# EAGLE board LG08.v1.0.2 (EAGLE 7.5.0)
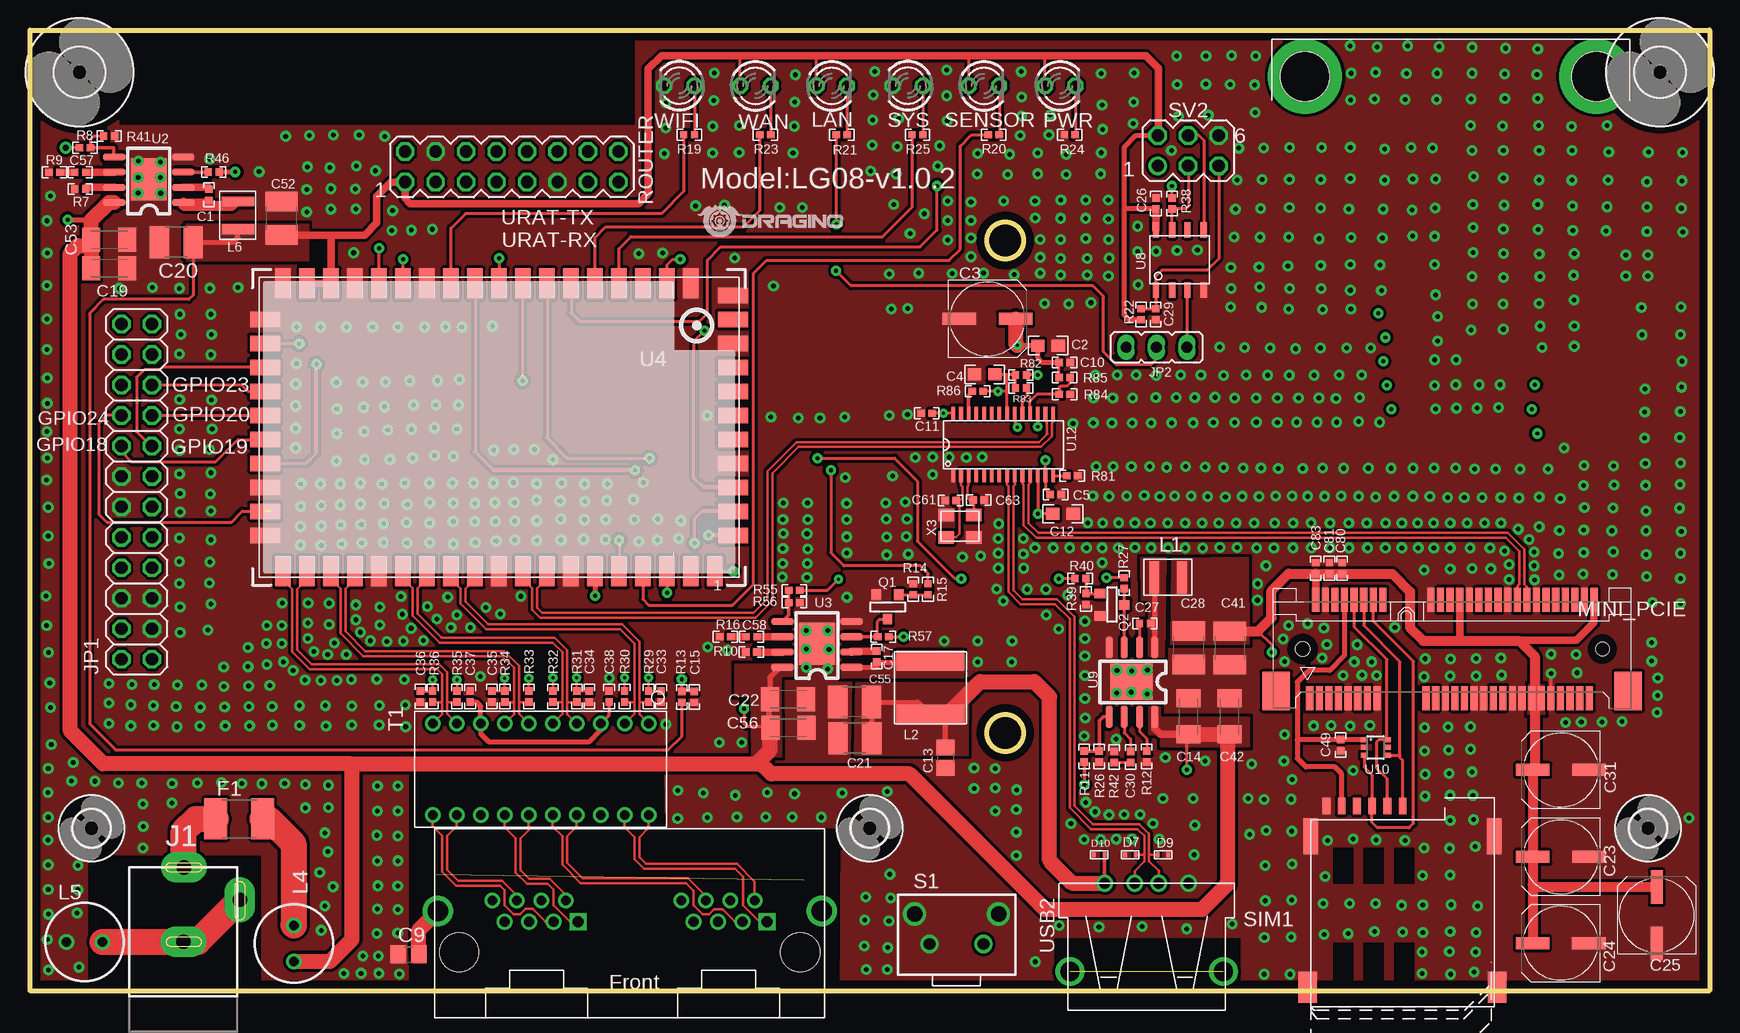
[diagram p0: board, top side]
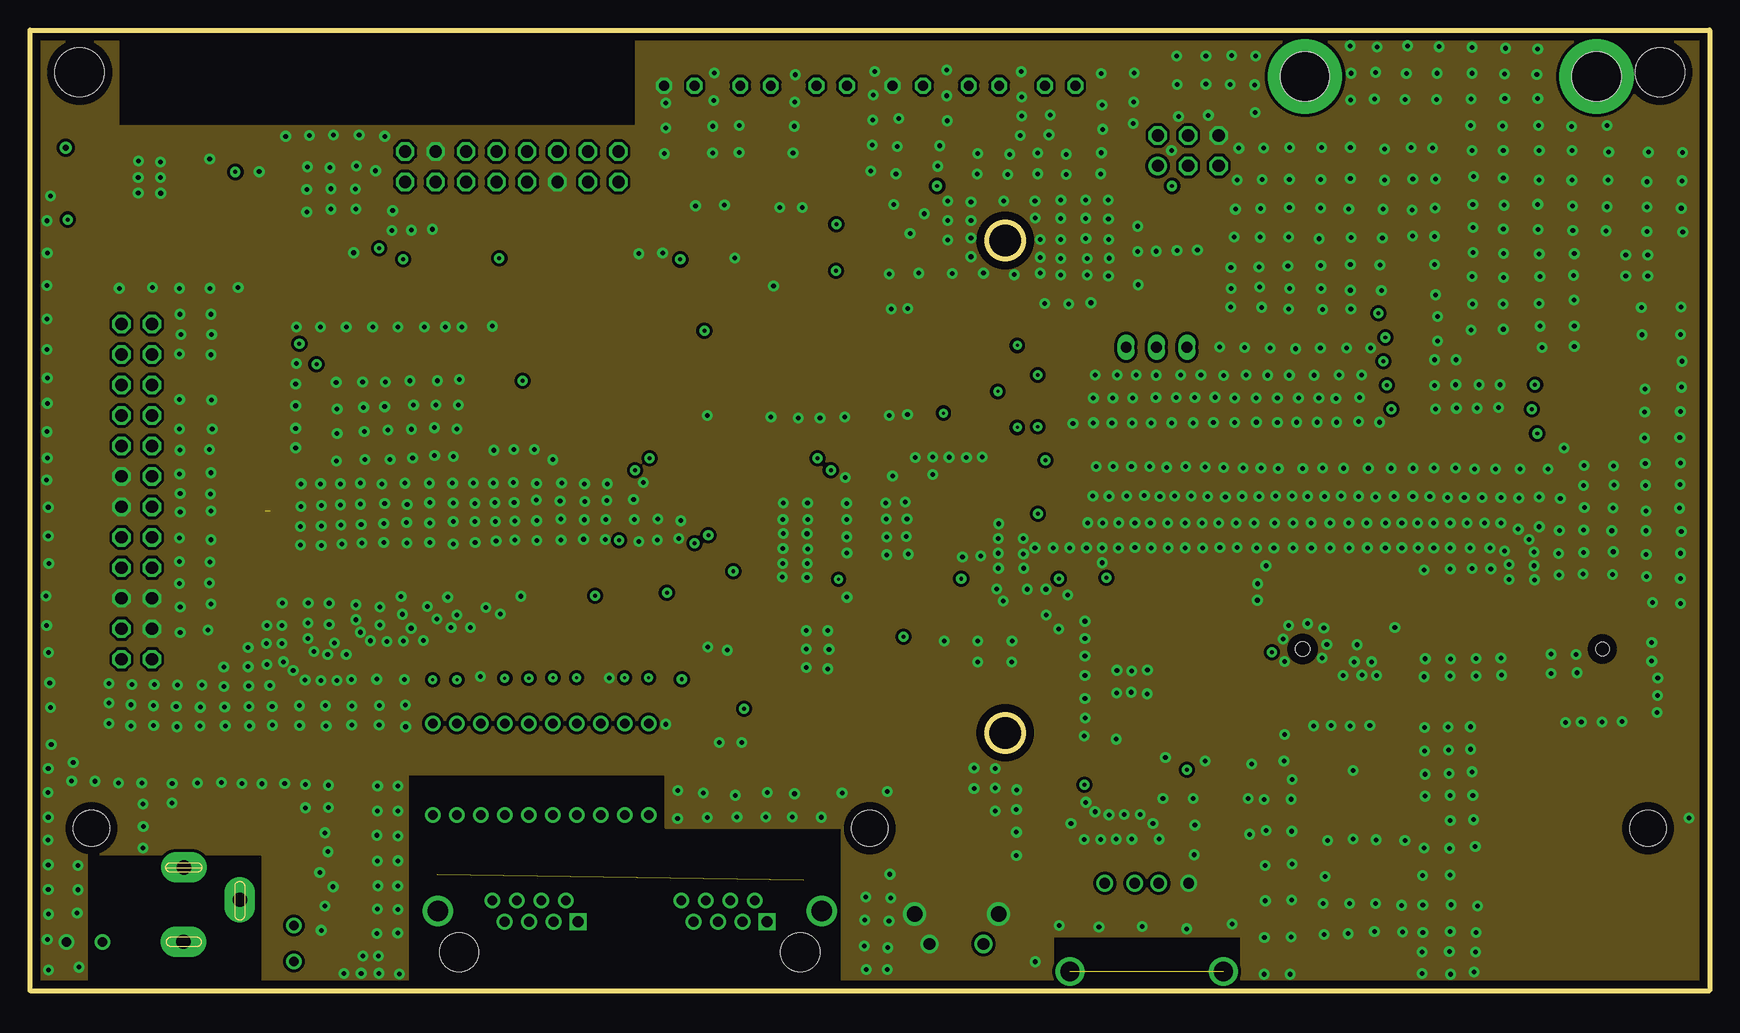
[diagram p1: board, inner layer Route2]
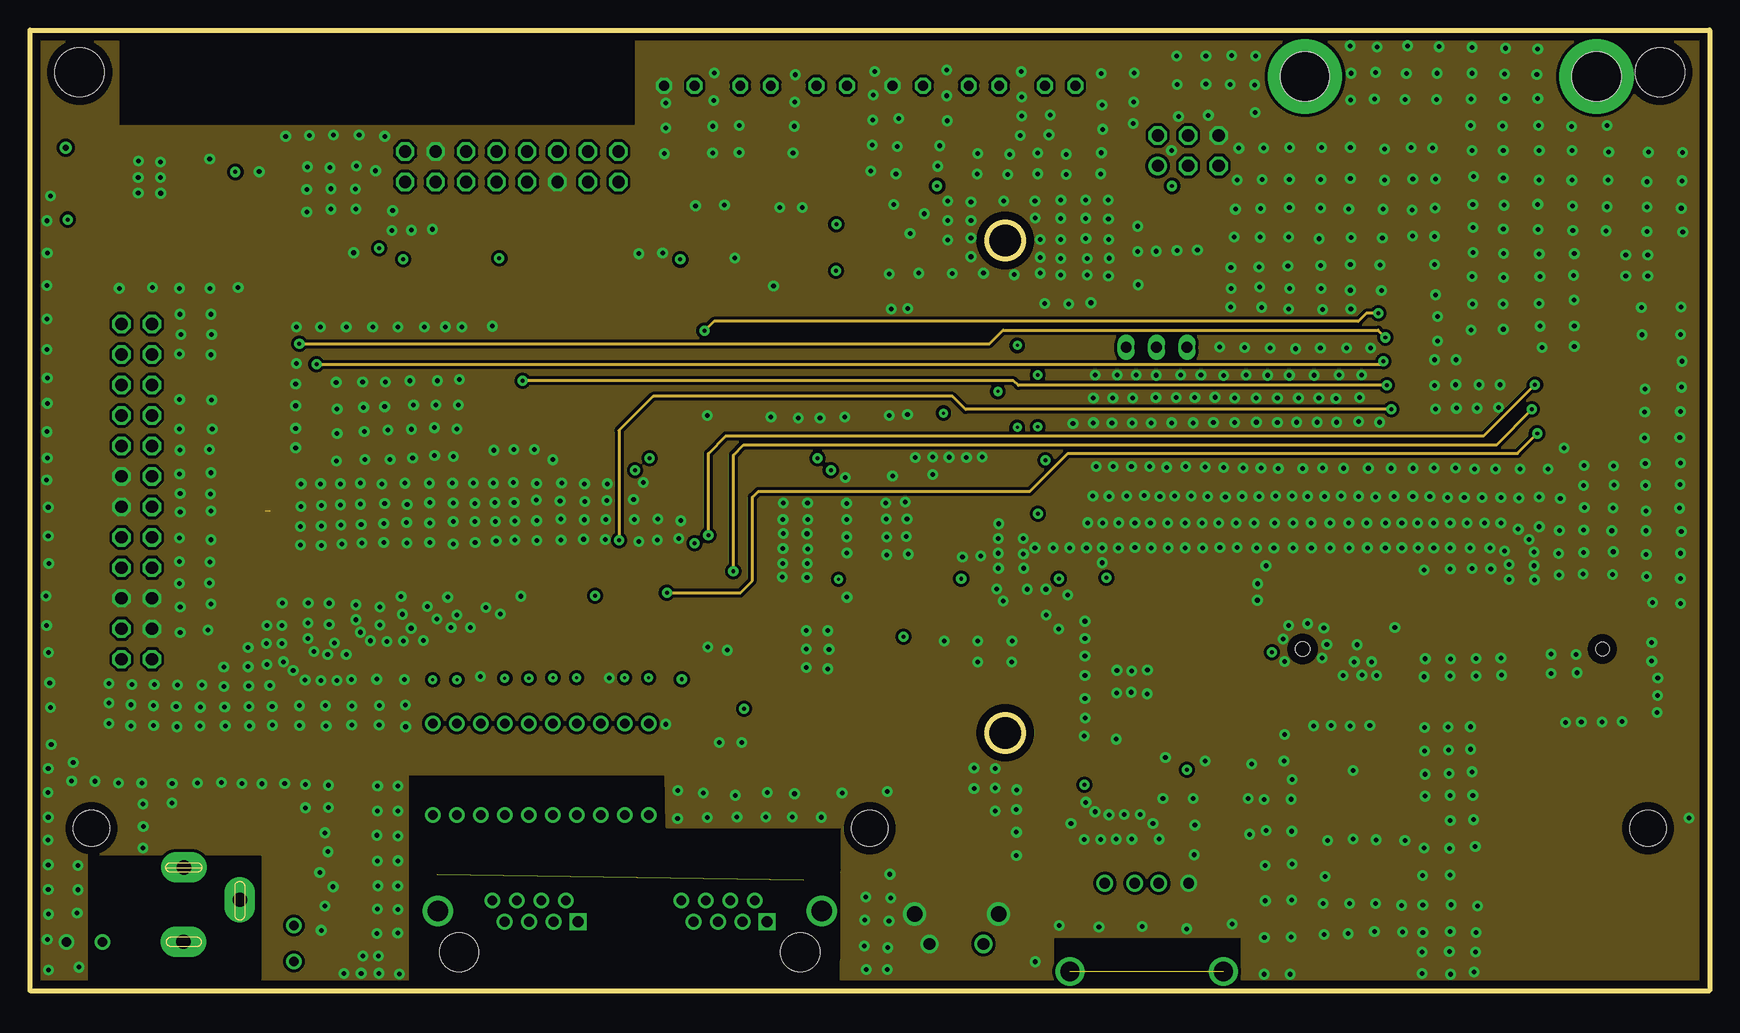
[diagram p2: board, inner layer Route15]
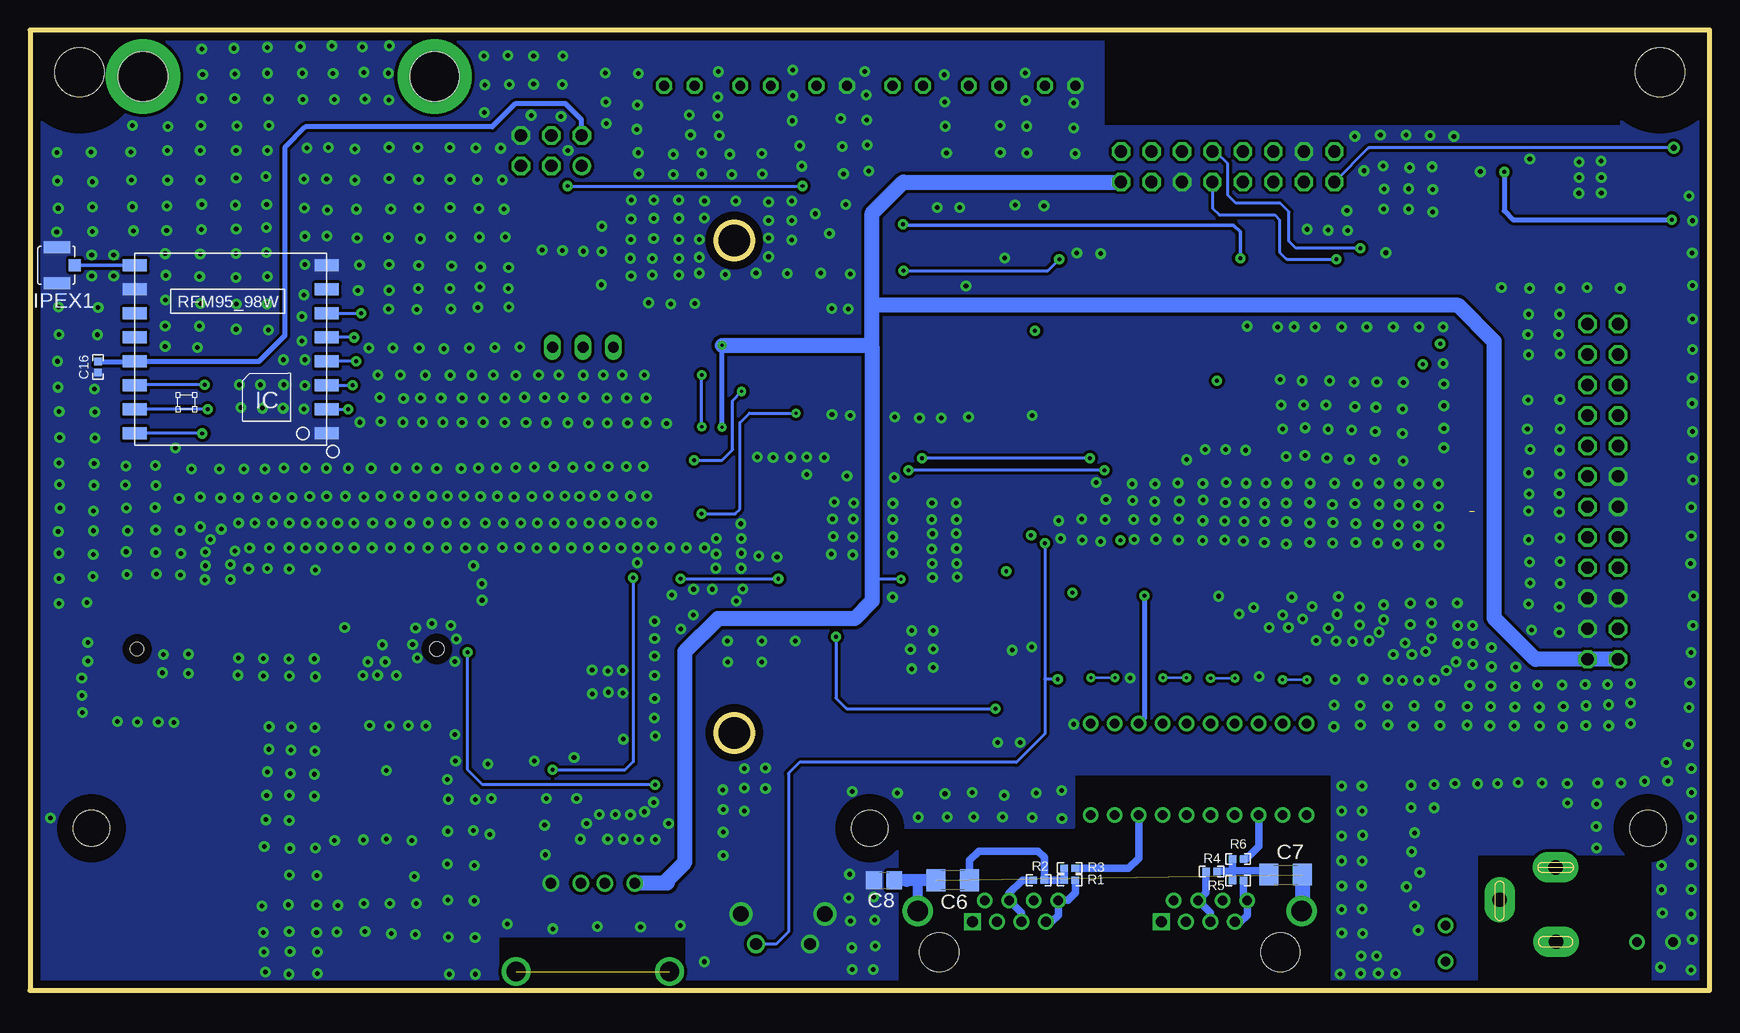
[diagram p3: board, bottom side, seen from below]

Size 140 x 80.05 mm. Coordinates in mm from the lower left corner, seen from the top.
Outline: 0,0 140,0 140,80.05 0,80.05 0,0
Outline: circle at 81.28,21.48 radius 1.52
Outline: circle at 81.28,62.5 radius 1.52
Copper layers (1*2+15*16): Top 0.035mm / dielectric 1.5mm / Route2 0.035mm / dielectric 0.15mm / Route15 0.035mm / dielectric 0.2mm / Bottom 0.035mm
Design rules "default *": minimum track width 5mil, minimum drill 10mil, track to track 8mil, track to pad 8mil, pad to pad 8mil, via to via 10mil, smd to smd 8mil, copper to edge 26mil, drill to drill 10mil, minimum pad ring 10mil, minimum via ring 10mil, stop-mask expansion 1mil, vias tented up to drill 30mil, thermal gap 10mil
Net classes: 0 default: clearance 0.205 mm; 1 2layer-50ohm: width 1 mm, clearance 0.2 mm; 2 gnd: width 0.305 mm, drill 0.33 mm, clearance 0.254 mm; 3 usbvcc: width 0.508 mm, drill 0.61 mm, clearance 0.254 mm; 4 aref: width 0.406 mm, drill 0.61 mm, clearance 0.254 mm; 6 usbtrace-4layer: width 0.191 mm, clearance 0.203 mm

## Footprints (pad centres in the part's own frame; a part is rotated, then mirrored left to right if it is on the bottom)
C0402 = smd 0.61 x 0.61: 1 -0.457,0; 2 0.457,0
C0603 = smd 1.1 x 1: 1 -0.85,0; 2 0.85,0
UD-6,3X5,8_NICHICON = smd 2.8 x 1: + 2.35,0; - -2.35,0
C1206 = smd 1.6 x 1.8: 1 -1.4,0; 2 1.4,0
C0805 = smd 1.3 x 1.5: 1 -0.85,0; 2 0.85,0
C1206K = smd 1.5 x 2: 1 -1.5,0; 2 1.5,0
C1210 = smd 1.6 x 2.7: 1 -1.4,0; 2 1.4,0
SOD−923 = smd 0.3 x 0.4: P$1 -0.45,0; P$2 0.45,0
L1812 = smd 1.9 x 3.4: 1 -1.95,0; 2 1.95,0
I-PEX = smd 1 x 2.2: GND -1.65,-0.27; GND1 1.35,-0.27 | smd 1 x 1: SIG -0.15,-1.77
POWER_JACK_SLOT = drill 1.2 pad 2.54 long: GND@1 0,0; GND@2 4.7,3.5; PWR 0.04,6.2
ETHERNET-1X2 = drill 0.94 pad 1.27 square: 1-1 4.305,-2.54; 2-1 -11.445,-2.54 | drill 0.8: 1-2 5.325,-4.32; 1-3 6.345,-2.54; 1-4 7.365,-4.32; 1-5 8.385,-2.54; 1-6 9.405,-4.32; 1-7 10.425,-2.54; 1-8 11.445,-4.32; 2-2 -10.425,-4.32; 2-3 -9.405,-2.54; 2-4 -8.385,-4.32; 2-5 -7.365,-2.54; 2-6 -6.345,-4.32; 2-7 -5.325,-2.54; 2-8 -4.305,-4.32 | drill 1.7: S1 16,-3.43; S2 -16,-3.43 | hole 3.25: -14.225,0; 14.225,0
2X12 = drill 1.016 octagon: 1 -13.97,-1.27; 2 -13.97,1.27; 3 -11.43,-1.27; 4 -11.43,1.27; 5 -8.89,-1.27; 6 -8.89,1.27; 7 -6.35,-1.27; 8 -6.35,1.27; 9 -3.81,-1.27; 10 -3.81,1.27; 11 -1.27,-1.27; 12 -1.27,1.27; 13 1.27,-1.27; 14 1.27,1.27; 15 3.81,-1.27; 16 3.81,1.27; 17 6.35,-1.27; 18 6.35,1.27; 19 8.89,-1.27; 20 8.89,1.27; 21 11.43,-1.27; 22 11.43,1.27; 23 13.97,-1.27; 24 13.97,1.27
JP2 = drill 0.914 long: 1 -2.54,0; 2 0,0; 3 2.54,0
SWPA3010S = smd 0.8 x 2.7: P$1 -1.15,0; P$2 1.15,0
SWPA6028S = smd 5.7 x 1.7: P$1 0,2.25; P$2 0,-2.25
BS11 = drill 0.8: 1 -1.5,0; 2 1.5,0
LED3MM = drill 0.813 octagon: A -1.27,0; K 1.27,0
679105700 = smd 0.6 x 2: 1 0.6,-4.1; 2 1.1,4.1; 3 1.4,-4.1; 4 1.9,4.1; 5 2.2,-4.1; 6 2.7,4.1; 7 3,-4.1; 8 3.5,4.1; 9 3.8,-4.1; 10 4.3,4.1; 11 4.6,-4.1; 12 5.1,4.1; 13 5.4,-4.1; 14 5.9,4.1; 15 6.2,-4.1; 16 6.7,4.1; 17 10.3,-4.1; 18 10.7,4.1; 19 11.1,-4.1; 20 11.5,4.1; 21 11.9,-4.1; 22 12.3,4.1; 23 12.7,-4.1; 24 13.1,4.1; 25 13.5,-4.1; 26 13.9,4.1; 27 14.3,-4.1; 28 14.7,4.1; 29 15.1,-4.1; 30 15.5,4.1; 31 15.9,-4.1; 32 16.3,4.1; 33 16.7,-4.1; 34 17.1,4.1; 35 17.5,-4.1; 36 17.9,4.1; 37 18.3,-4.1; 38 18.7,4.1; 39 19.1,-4.1; 40 19.5,4.1; 41 19.9,-4.1; 42 20.3,4.1; 43 20.7,-4.1; 44 21.1,4.1; 45 21.5,-4.1; 46 21.9,4.1; 47 22.3,-4.1; 48 22.7,4.1; 49 23.1,-4.1; 50 23.5,4.1; 51 23.9,-4.1; 52 24.3,4.1 | drill 4.09 pad 6.2: 53 0.2,47.7; 54 24.5,47.7 | smd 2.3 x 3.2: M1 27.15,-3.5; M2 -2.2,-3.5 | hole 1.2: 0,0 | hole 1.1: 25,0 | hole 4.09: 0.2,47.7; 24.5,47.7
SOT-23 = smd 0.787 x 0.889: 1 0,-1.016; 2 -0.95,1.016; 3 0.95,1.016
R0402 = smd 0.61 x 0.61: 1 -0.457,0; 2 0.457,0
MA08-2 = drill 1.016 octagon: 1 -8.89,-1.27; 2 -8.89,1.27; 3 -6.35,-1.27; 4 -6.35,1.27; 5 -3.81,-1.27; 6 -3.81,1.27; 7 -1.27,-1.27; 8 -1.27,1.27; 9 1.27,-1.27; 10 1.27,1.27; 11 3.81,-1.27; 12 3.81,1.27; 13 6.35,-1.27; 14 6.35,1.27; 15 8.89,-1.27; 16 8.89,1.27
SWITCH_6X6X5 = drill 0.991 pad 1.524: 1 -2.25,0; 2 2.25,0 | drill 1.295 pad 1.905: 3 3.5,2.5; 4 -3.5,2.5
SIM-MICRO-PUSH = smd 0.65 x 1.35: CLK 7.91,15.105; GND 1.56,15.105; IO 6.64,15.105; RST 5.37,15.105; VCC 2.83,15.105; VPP 4.1,15.105 | smd 1.55 x 2.6: P$1 0,0; P$2 15.8,0 | smd 1.2 x 3: P$3 15.55,12.58; P$4 0.25,12.58
MA03-2 = drill 1.016: 1 -2.54,-1.27 | drill 1.016 octagon: 2 -2.54,1.27; 3 0,-1.27; 4 0,1.27; 5 2.54,-1.27; 6 2.54,1.27
RIONET_H2038 = drill 0.8: 1 -3.81,9; 2 -3.81,7; 3 -3.81,5; 4 -3.81,3; 5 -3.81,1; 6 -3.81,-1; 7 -3.81,-3; 8 -3.81,-5; 9 -3.81,-7; 10 -3.81,-9; 11 3.81,-9; 12 3.81,-7; 13 3.81,-5; 14 3.81,-3; 15 3.81,-1; 16 3.81,1; 17 3.81,3; 18 3.81,5; 19 3.81,7; 20 3.81,9
RFM92_93W = smd 2 x 1: 1 -8,7; 2 -8,5; 3 -8,3; 4 -8,1; 5 -8,-1; 6 -8,-3; 7 -8,-5; 8 -8,-7; 9 8,-7; 10 8,-5; 11 8,-3; 12 8,-1; 13 8,1; 14 8,3; 15 8,5; 16 8,7
RT8250-SOP8 = smd 1.88 x 0.61: 1 -1.219,0; 2 -1.219,-1.27; 3 -1.219,-2.54; 4 -1.219,-3.81; 5 4.547,-3.81; 6 4.547,-2.54; 7 4.547,-1.27; 8 4.547,0 | smd 2.997 x 3.505: 9 1.651,-1.956
HE-4025 = smd 1.3 x 2.5: 1 -18,12; 2 -16,12; 3 -14,12; 4 -12,12; 5 -10,12; 6 -8,12; 7 -6,12; 8 -4,12; 9 -2,12; 10 0,12; 11 2,12; 12 4,12; 13 6,12; 14 8,12; 15 10,12; 16 12,12; 17 14,12; 18 16,12; 19 18,12; 30 18,-12; 31 16,-12; 32 14,-12; 33 12,-12; 34 10,-12; 35 8,-12; 36 6,-12; 37 4,-12; 38 2,-12; 39 0,-12; 40 -2,-12; 41 -4,-12; 42 -6,-12; 43 -8,-12; 44 -10,-12; 45 -12,-12; 46 -14,-12; 47 -16,-12 | smd 2.5 x 1.3: 20 19.5,9; 21 19.5,7; 22 19.5,5; 23 19.5,3; 24 19.5,1; 25 19.5,-1; 26 19.5,-3; 27 19.5,-5; 28 19.5,-7; 29 19.5,-9; 48 -19.5,-11; 49 -19.5,-9; 50 -19.5,-7; 51 -19.5,-5; 52 -19.5,-3; 53 -19.5,-1; 54 -19.5,1; 55 -19.5,3; 56 -19.5,5; 57 -19.5,7; 58 -19.5,9
S8S1 = smd 1.27 x 0.51: 1 -0.54,5.47; 2 -0.54,4.11; 3 -0.54,2.84; 4 -0.54,1.48; 5 4.46,1.48; 6 4.46,2.84; 7 4.46,4.11; 8 4.46,5.47
SOT363 = smd 0.42 x 0.6: 1 -0.65,-0.95; 2 0,-0.95; 3 0.65,-0.95; 4 0.65,0.95; 5 0,0.95; 6 -0.65,0.95
USB_HUB_FE1.1S = smd 0.3 x 1.1: 1 -4.16,-2.6; 2 -3.52,-2.6; 3 -2.88,-2.6; 4 -2.24,-2.6; 5 -1.6,-2.6; 6 -0.96,-2.6; 7 -0.32,-2.6; 8 0.32,-2.6; 9 0.96,-2.6; 10 1.6,-2.6; 11 2.24,-2.6; 12 2.88,-2.6; 13 3.52,-2.6; 14 4.16,-2.6; 15 4.16,2.62; 16 3.52,2.62; 17 2.88,2.62; 18 2.24,2.62; 19 1.6,2.62; 20 0.96,2.62; 21 0.32,2.62; 22 -0.32,2.62; 23 -0.96,2.62; 24 -1.6,2.62; 25 -2.24,2.62; 26 -2.88,2.62; 27 -3.52,2.62; 28 -4.16,2.62
3,0 = hole 3: 0,0
4,1 = hole 4.1: 0,0
USB_C42562 = drill 0.9: 1 -3.5,5.29; 2 -1,5.29; 3 1,5.29; 4 3.5,5.29 | drill 1.6: 5 -6.4,-2.06; 6 6.4,-2.06
SMARTPRJ_CRYSTAL-3.2-2.5 = smd 1.3 x 1.05: 1 -1.15,-0.925; 2 1.15,-0.925; 3 1.15,0.925; 4 -1.15,0.925

## Placement (x,y rotation side)
C1  0.1u,50v  [C0402]  14.91,66.32 270 top
C2  10uf 10v  [C0603]  84.86,53.76 0 top
C3  100uF 16v TBD  [UD-6,3X5,8_NICHICON]  79.81,55.97 0 top
C4  10uf 10v  [C0603]  79.58,51.35 180 top
C5  0.1u  [C0402]  85.5,41.34 0 top
C6  1000pF,2kv  [C1206]  63.09,9.2 180 bottom
C7  1000pF,2kv  [C1206]  35.34,9.67 0 bottom
C8  0.1u,100V  [C0805]  68.79,9.19 0 bottom
C9  0.1u,100V  [C0805]  31.55,3.01 0 top
C10  0.1u  [C0402]  86.24,52.35 0 top
C11  0.1u  [C0402]  74.75,48.12 180 top
C12  10uf 10v  [C0603]  86.1,39.74 0 top
C13  10u,10V  [C0805]  76.3,19.4 270 top
C14  10uf,50v  [C1206K]  96.55,22.85 90 top
C15  100nF  [C0402]  55.37,24.48 90 top
C16  0.1uF 10V  [C0402]  134.34,51.96 90 bottom
C17  0.1u,50v  [C0402]  70.59,27.83 270 top
C19  10uf,50v  [C1206K]  6.6,60.2 0 top
C20  22uF,10v  [C1210]  12.19,62.36 180 top
C21  22uf,10v  [C1210]  68.76,21.03 180 top
C22  10uf,50v  [C1206K]  63.2,24.28 0 top
C23  470uF,JLC-C116423  [UD-6,3X5,8_NICHICON]  127.61,11.15 180 top
C24  470uF,JLC-C116423  [UD-6,3X5,8_NICHICON]  127.59,3.96 180 top
C25  470uF,JLC-C116423  [UD-6,3X5,8_NICHICON]  135.59,6.27 90 top
C26  0.1uF,25V  [C0402]  93.86,65.6 270 top
C27  0.1u,50v  [C0402]  92.94,30.6 0 top
C28  22fu,10v  [C1210]  96.57,28.57 270 top
C29  100pF  [C0402]  93.83,56.36 90 top
C30  2.7nf  [C0402]  91.75,19.48 90 top
C31  470uF,JLC-C116423  [UD-6,3X5,8_NICHICON]  127.61,18.38 180 top
C33  0.1u 10v  [C0402]  52.61,24.5 270 top
C34  0.1u 10v  [C0402]  46.61,24.5 270 top
C35  0.1u 10v  [C0402]  38.51,24.5 270 top
C36  0.1u 10v  [C0402]  32.54,24.5 270 top
C37  0.1u  [C0402]  36.68,24.5 90 top
C38  0.1u  [C0402]  48.26,24.5 90 top
C41  22uf,10v  [C1210]  100,28.54 270 top
C42  10uf,50v  [C1206K]  99.98,22.85 90 top
C49  0.1u  [C0402]  109.25,20.47 270 top
C52  22uF,10v  [C1210]  20.98,64.37 90 top
C53  10uf,50v  [C1206K]  6.6,62.56 0 top
C55  22fu,10v  [C1210]  68.74,24.05 180 top
C56  10uf,50v  [C1206K]  63.22,21.89 0 top
C57  2.7nf  [C0402]  4.19,68.2 0 top
C58  2.7nf  [C0402]  60.15,29.48 0 top
C61  18pF  [C0402]  76.76,40.86 0 top
C63  18pF  [C0402]  79.09,40.88 180 top
C80  33pf  [C0402]  109.38,35.2 90 top
C81  10pf  [C0402]  108.31,35.2 90 top
C83  33pf  [C0402]  107.17,35.2 90 top
D7  ESD7951ST5G  [SOD−923]  91.72,11.32 0 top
D9  ESD7951ST5G  [SOD−923]  94.44,11.32 180 top
D10  ESD7951ST5G  [SOD−923]  89.13,11.32 0 top
F1  2A  [L1812]  17.44,14.32 0 top
IPEX1  I-PEX  [I-PEX]  138.03,60.6 90 bottom
J1  POWER_JACKSLT  [POWER_JACK_SLOT]  12.79,4.07 0 top
J2  ETHERNET_2PORT  [ETHERNET-1X2]  49.99,3.2 180 top
JP1  [2X12]  8.9,41.58 90 top
JP2  [JP2]  93.91,53.61 0 top
L1  4.7uH /SWPA3015S4R7MT  [SWPA3010S]  94.87,34.44 0 top
L2  6.8uH / SWPA6045S6R8MT  [SWPA6028S]  75.06,25.24 0 top
L4  bead  [BS11]  22,3.93 90 top
L5  bead  [BS11]  4.55,4.06 0 top
L6  4.7uH /SWPA3015S4R7MT  [SWPA3010S]  17.32,64.59 270 top
LAN  GREEN  [LED3MM]  66.82,75.4 0 top
MINI_PCIE  f5521gw  [679105700]  106.07,28.47 0 top
PWR  GREEN  [LED3MM]  85.87,75.4 0 top
Q1  BSS138-7-F  [SOT-23]  71.48,31.97 0 top
Q2  BSS138-7-F  [SOT-23]  90.2,32.15 90 top
R1  75  [R0402]  53.32,9.2 0 bottom
R2  75  [R0402]  55.91,9.2 180 bottom
R3  75  [R0402]  53.32,10.2 180 bottom
R4  75  [R0402]  41.51,9.93 180 bottom
R5  75  [R0402]  39.3,9.16 0 bottom
R6  75  [R0402]  39.3,10.97 180 bottom
R7  180K  [R0402]  4.19,66.8 180 top
R8  75K 1%  [R0402]  4.57,70.23 180 top
R9  16K 1%  [R0402]  2.03,68.2 0 top
R10  180K  [R0402]  60.12,28.21 180 top
R11  75K 1%  [R0402]  87.89,19.5 270 top
R12  180K  [R0402]  93.09,19.5 270 top
R13  330  [R0402]  54.33,24.48 90 top
R14  47K,NL  [R0402]  73.64,33.45 270 top
R15  4.7k  [R0402]  74.86,33.45 270 top
R16  24K  [R0402]  57.97,29.48 180 top
R19  270  [R0402]  54.94,71.32 0 top
R20  330  [R0402]  80.34,71.32 0 top
R21  330  [R0402]  67.66,71.32 0 top
R22  10K  [R0402]  92.64,56.36 270 top
R23  330  [R0402]  61.28,71.32 0 top
R24  330  [R0402]  86.68,71.32 0 top
R25  270  [R0402]  73.98,71.32 0 top
R26  24K 1%  [R0402]  89.13,19.5 90 top
R27  100K  [R0402]  91.21,33.95 90 top
R29  49.9  [R0402]  51.57,24.5 90 top
R30  49.9  [R0402]  49.56,24.5 90 top
R31  49.9  [R0402]  45.57,24.5 90 top
R32  49.9  [R0402]  43.59,24.5 90 top
R33  49.9  [R0402]  41.58,24.5 90 top
R34  49.9  [R0402]  39.58,24.5 90 top
R35  49.9  [R0402]  35.59,24.5 90 top
R36  49.9  [R0402]  33.56,24.5 90 top
R38  0R  [R0402]  95.2,65.6 270 top
R39  47K,NL  [R0402]  88.01,32.63 90 top
R40  4.7k  [R0402]  87.56,34.34 0 top
R41  24K 1%  [R0402]  6.61,71.21 180 top
R42  16K  [R0402]  90.38,19.48 90 top
R46  100K  [R0402]  15.32,68.23 180 top
R55  53.6K 1%  [R0402]  63.71,33.37 0 top
R56  10K 1%  [R0402]  63.71,32.33 180 top
R57  100K  [R0402]  71.12,29.48 0 top
R81  2.7K 1%  [R0402]  86.87,42.9 180 top
R82  100k  [R0402]  82.61,51.31 180 top
R83  100k  [R0402]  82.61,50.22 180 top
R84  100k  [R0402]  86.26,49.69 180 top
R85  47K  [R0402]  86.24,51.08 180 top
R86  100k  [R0402]  78.99,49.95 0 top
ROUTER  [MA08-2]  40.16,68.65 0 top
S1  [SWITCH_6X6X5]  77.23,3.89 0 top
SENSOR  GREEN  [LED3MM]  79.52,75.4 0 top
SIM1  SIM_CARD_CON_6MICRO  [SIM-MICRO-PUSH]  106.51,0.27 0 top
SV2  [MA03-2]  96.55,70 0 top
SYS  GREEN  [LED3MM]  73.17,75.4 180 top
T1  RJ45_TRANSFORMER_HST2038DR  [RIONET_H2038]  42.57,18.44 270 top
U1  RFM92_93W  [RFM92_93W]  123.27,53.44 180 bottom
U2  RT7272  [RT8250-SOP8]  11.56,65.66 180 top
U3  RT7272  [RT8250-SOP8]  67.26,26.94 180 top
U4  HE-4025  [HE-4025]  39.09,46.93 180 top
U8  ATTINY13  [S8S1]  99.32,58.92 90 top
U9  RT7272  [RT8250-SOP8]  93.75,27.38 270 top
U10  SMF05C  [SOT363]  112.17,20.26 270 top
U12  USB_HUB_FE1.1S  [USB_HUB_FE1.1S]  81.13,45.5 0 top
U$2  [SMA-JACK]  9.43,18.56 270 top
U$6  [3,0]  134.87,13.52 0 top
U$7  [LOGO-DRAGINO-2018]  55.65,62.81 0 top
U$8  [4,1]  135.87,76.53 0 top
U$10  [3,0]  5.13,13.52 0 top
U$13  [3,0]  70,13.52 0 top
U$14  [4,1]  4.13,76.53 0 top
USB2  USB_C42562  [USB_C42562]  93.09,3.65 0 top
WAN  GREEN  [LED3MM]  60.47,75.4 0 top
WIFI  GREEN  [LED3MM]  54.12,75.4 180 top
X3  12Mhz,X322512MMB4SI  [SMARTPRJ_CRYSTAL-3.2-2.5]  77.52,38.7 180 top

## Library data of the parts
C1 C3 C6-C9 C13-C15 C17 C19-C31 C33-C38 C41 C42 C49 C52 C53 C55-C58 D7 D9 D10 F1 J1 J2 JP2 L1 L6 R1-R16 R19-R27 R29-R36 R38-R42 R46 R55-R57 R81-R86 S1 T1 U1-U4 U9 U10 U12 U$7 = dragino
C2 C4 C5 C10-C12 C16 C61 C63 C80 C81 C83 IPEX1 L2 SIM1 U$2 USB2 X3 = dragino-passive
JP1 = pinhead
L4 L5 = inductor-neosid; OC_FARNELL: unknown; OC_NEWARK: unknown
LAN PWR SENSOR SYS WAN WIFI = led
MINI_PCIE = dragino; MPN: 67910-5700; OC_FARNELL: unknown; OC_NEWARK: 93M2128
Q1 Q2 ROUTER = dragino; OC_FARNELL: unknown; OC_NEWARK: unknown
SV2 = con-lstb; OC_FARNELL: unknown; OC_NEWARK: unknown
U8 = din
U$6 U$8 U$10 U$13 U$14 = holes

## Nets
2.0V_CTL: C37.1 C38.1 T1.3 T1.8 U4.6
5V_LDO: ROUTER.2
+3V3: C16.2 C20.1 C26.2 C52.1 L6.P$2 LAN.A PWR.A R8.2 R13.1 R22.2 ROUTER.1 SENSOR.A SV2.2 U1.13 U4.31 U4.32 U8.8 WAN.A
+5V: C2.1 C3.+ C10.1 C13.1 C21.1 C55.1 D10.P$2 JP1.1 JP1.2 L2.P$2 R55.2 R85.2 ROUTER.15 U12.20 USB2.1
AGND: C6.2 C7.2 C8.2 C9.2 J2.S1 J2.S2
ANT [2layer-50ohm]: IPEX1.SIG U1.9
CLK_N: C63.2 U12.3 X3.1
CLK_P: C61.2 U12.2 X3.3
CSN: JP1.15 U4.27
DIO0: U1.14 U4.58
DIO1: U1.15 U4.1
DIO2: U1.16 U4.3
DIO3: U1.11
DIO4: U1.12
DIO5: U1.7
GND [gnd]: C2.2 C3.- C4.2 C5.2 C8.1 C9.1 C10.2 C11.2 C12.2 C13.2 C14.2 C15.1 C16.1 C19.2 C20.2 C21.2 C22.2 C23.- C24.- C25.- C26.1 C28.2 C29.1 C31.- C33.2 C34.2 C35.2 C36.2 C37.2 C38.2 C41.2 C42.2 C49.2 C52.2 C53.2 C55.2 C56.2 C61.1 C63.1 C80.2 C81.2 C83.2 D7.P$1 D9.P$1 D10.P$1 IPEX1.GND IPEX1.GND1 JP1.3 JP1.5 JP1.6 JP1.12 JP1.14 L5.1 MINI_PCIE.4 MINI_PCIE.9 MINI_PCIE.15 MINI_PCIE.18 MINI_PCIE.21 MINI_PCIE.26 MINI_PCIE.27 MINI_PCIE.29 MINI_PCIE.34 MINI_PCIE.35 MINI_PCIE.37 MINI_PCIE.40 MINI_PCIE.43 MINI_PCIE.50 Q1.2 Q2.2 R7.2 R9.1 R10.2 R12.2 R14.1 R16.2 R24.1 R26.1 R39.1 R41.1 R42.2 R56.1 R81.1 R84.1 ROUTER.4 ROUTER.11 S1.1 S1.3 S1.4 SIM1.GND SIM1.P$1 SIM1.P$2 SIM1.P$3 SIM1.P$4 SV2.6 SYS.K U1.1 U1.8 U1.10 U2.4 U2.9 U3.4 U3.9 U4.7 U4.10 U4.15 U4.20 U4.22 U4.29 U4.30 U4.33 U4.36 U4.47 U4.48 U4.50 U4.55 U8.4 U9.4 U9.9 U10.2 U12.1 USB2.4 WIFI.K X3.2 X3.4
GPIO1: R15.1 U4.38
GPIO2: U4.54
GPIO3: U4.51
GPIO4: U4.52
GPIO5: U4.53
GPIO11: C15.2 R13.2 S1.2 U4.57
GPIO15: R40.1 U4.41
GPIO16: R38.1 U4.42
GPIO21: ROUTER.5
GPIO22: ROUTER.7
GPIO26: ROUTER.13
GPIO27: R20.1 U4.4
GPIO28: R25.1 U4.44
LED0: R19.1 U4.37
LED2: R21.1 U4.39
LED6: R23.1 U4.43
LNA_EN_A: JP1.4
MIS0_AT: U8.6
MISO: JP1.17 U4.25
MISO_AT: SV2.1
MOSI: JP1.16 U4.24
MOSI_AT: SV2.4 U8.5
N$1: R25.2 SYS.A
N$2: J1.GND@1 J1.GND@2 L5.2
N$3: F1.2 L4.2
N$4: JP2.3 U8.3
N$6: JP1.21
N$7: R6.1 T1.13
N$8: JP1.23
N$9: JP1.20
N$10: JP1.22
N$11: JP1.24
N$12: F1.1 J1.PWR
N$13: R20.2 SENSOR.K
N$16: Q1.1 R57.1 U3.3
N$17: R10.1 U3.7
N$18: R86.1 U12.26
N$19: Q1.3 R14.2 R15.2
N$20: C58.2 U3.6
N$22 [gnd]: R55.1 R56.2 U3.5
N$23: R19.2 WIFI.A
N$24: C1.2 L6.P$1 U2.1
N$25: R46.2 U2.3
N$26: R7.1 U2.7
N$27: C1.1 U2.2
N$29: C57.1 R9.2
N$30: LAN.K R21.2
N$31: C57.2 U2.6
N$32: C58.1 R16.1
N$34: C17.2 L2.P$1 U3.1
N$35: PWR.K R24.2
N$39: C35.1 R33.2 R34.2
N$40: C36.1 R35.2 R36.2
N$41: J2.2-7 J2.2-8 R1.2
N$42: J2.2-4 J2.2-5 R2.2
N$43: C33.1 R29.2 R30.2
N$44: C34.1 R31.2 R32.2
N$45: R3.1 T1.18
N$46: C6.1 R1.1 R2.1 R3.2
N$49: R8.1 R41.2 U2.5
N$51: J2.1-7 J2.1-8 R5.2
N$52: J2.1-4 J2.1-5 R4.2
N$54: C7.1 R4.1 R5.1 R6.2
N$55: C17.1 U3.2
N$56 [gnd]: R11.1 R26.2 U9.5
N$63: Q2.1 R27.1 U9.3
N$64: R12.1 U9.7
N$65: Q2.3 R39.2 R40.2
N$66: C30.2 U9.6
N$67: C30.1 R42.1
N$68: C27.2 L1.P$1 U9.1
N$69: C27.1 U9.2
N$109: R81.2 U12.14
N$111: R82.1 U12.17
N$112: R83.1 U12.19
N$113: R84.2 R85.1 U12.18
OPTIONAL_ANT: U4.49
P0_R_N: J2.2-6 T1.17
P0_R_P: J2.2-3 T1.16
P0_RX_N: R31.1 T1.4 U4.13
P0_RX_P: R32.1 T1.5 U4.14
P0_T_N: J2.2-2 T1.20
P0_T_P: J2.2-1 T1.19
P0_TX_N: R29.1 T1.1 U4.11
P0_TX_P: R30.1 T1.2 U4.12
P4_R_N: J2.1-6 T1.12
P4_R_P: J2.1-3 T1.11
P4_RX_N: R35.1 T1.9 U4.18
P4_RX_P: R36.1 T1.10 U4.19
P4_T_N: J2.1-2 T1.15
P4_T_P: J2.1-1 T1.14
P4_TX_N: R33.1 T1.6 U4.16
P4_TX_P: R34.1 T1.7 U4.17
PA_EN_A: JP1.11
PA_G8: JP1.8
PA_G16: JP1.10
RADIO_EN_A: JP1.7
RADIO_EN_B: JP1.9
RADIO_RST: JP1.13
RESET: JP1.19 U4.26
RESET_ROUTE: JP2.2 U4.46
RESET_ROUTE1: ROUTER.3
REST_AT: C29.2 R22.1 SV2.5 U8.1
RF_CSN: U1.5 U4.28
RF_MISO: U1.2 U4.5
RF_MOSI: U1.3 U4.40
RF_RESET: U1.6 U4.56
RF_SCK: U1.4 U4.23
SCK: JP1.18 U4.21
SCK_AT: R38.2 SV2.3 U8.7
SENSOR_LED: ROUTER.16
SIM_CLK: MINI_PCIE.12 SIM1.CLK U10.4
SIM_DATA: MINI_PCIE.10 SIM1.IO U10.6
SIM_RST: MINI_PCIE.14 SIM1.RST U10.3
SIM_VCC: C49.1 MINI_PCIE.8 SIM1.VCC U10.1
UART_RX: ROUTER.9 U4.35
UART_TX: ROUTER.10 U4.34
USB1_N: MINI_PCIE.36 U12.10
USB1_P: MINI_PCIE.38 U12.11
USB2_N [usbtrace-4layer]: D7.P$2 U12.8 USB2.2
USB2_P [usbtrace-4layer]: D9.P$2 U12.9 USB2.3
USB3.3: C4.1 C5.1 R82.2 R83.2 R86.2 U12.13 U12.21
USB3_N: U12.6
USB3_P: U12.7
USB4_N: U12.4
USB4_P: U12.5
USB_GND [gnd]: USB2.5 USB2.6
USB_N: U4.9 U12.15
USB_P: U4.8 U12.16
VCC18: C11.1 C12.1 U12.12 U12.28
VCC_3G: C23.+ C24.+ C25.+ C28.1 C31.+ C41.1 C80.1 C81.1 C83.1 L1.P$2 MINI_PCIE.2 MINI_PCIE.24 MINI_PCIE.39 MINI_PCIE.41 MINI_PCIE.52 R11.2
VIN: C14.1 C19.1 C22.1 C42.1 C53.1 C56.1 L4.1 R27.2 R46.1 R57.2 U2.8 U3.8 U9.8
YELLOW: R23.2 WAN.K

## Tracks (layer width: path | path; a pad name or v marks a point on that pad's centre or on a via)
2.0V_CTL  (via drill 0.33)
  Top 0.305: C38.1 48.26,22.94 T1.3
  Top 0.406: C37.1 37.21,24.05 37.57,23.69 T1.8 37.57,21.4 38.23,20.75 46.64,20.75 47.58,21.69 T1.3 | U4.6 v47.09,32.91
  Bottom 0.406: v47.09,32.91 47.09,22.73 T1.3
+3V3  (via drill 0.5)
  Top 0.254: WAN.A 59.2,77.86 59.24,77.9 | LAN.A 65.55,77.6 65.26,77.9 | SENSOR.A 78.25,77.71 78.44,77.9 | PWR.A 84.6,77.86 84.64,77.9 | R8.2 v2.98,70.23 v2.97,70.23 | C20.1 13.59,57.96 13.24,57.6 6.12,57.6 4.98,56.46 4.98,22.22 7.14,20.06 53.19,20.06 54.33,21.2 R13.1
  Top 0.406: C20.1 16.95,62.36 17.33,62.73 L6.P$2 | R22.2 91.62,55.9 91.21,56.31 91.21,65.17 | 91.21,65.17 91.21,70.28 92.2,71.27 SV2.2 | 93.85,65.14 91.25,65.14 91.21,65.17
  Top 0.61: U8.8 93.85,65.14 C26.2 | SV2.2 94.06,71.32 94.06,76.85 93.02,77.9 84.64,77.9 78.44,77.9 65.26,77.9 59.24,77.9 52.63,77.9 51.54,76.8 51.54,66.39 50.73,65.58 31.7,65.58 31.27,66.01 ROUTER.1 30.08,67.38 28.91,66.21 28.91,63.98 27.9,62.97 25.28,62.97 | C52.1 25.28,62.97 | 25.28,62.97 25.09,62.78 U4.32 U4.31
  Bottom 0.254: v2.97,70.23 28.43,70.23 ROUTER.1
  Bottom 0.406: C16.2 131.29,52.42 U1.13 120.92,52.44 118.75,54.6 118.75,70.28 117.05,71.98 101.48,71.98 99.52,73.93 95.38,73.93 94.06,72.61 94.06,71.32 SV2.2
  pour Top (no thermals): 13.08,63.88 13.08,60.84 23.24,60.81 23.24,63.86
+5V  (via drill 0.25)
  Top 0.254: U12.20 82.09,47.15 v82.3,46.93 | R85.2 C10.1 | R55.2 66.47,33.37 v67.39,34.28
  Top 0.305: D10.P$2 USB2.1
  Top 0.406: v82.3,53.77 C2.1 84,52.72 84.37,52.35 C10.1 | C13.1 76.3,23.18 76.11,22.99 L2.P$2 74,24.05 C55.1 70.14,21.23 70.16,21.2 C21.1
  Top 1.27: C3.+ 82.16,53.91 v82.3,53.77 | USB2.1 89.57,8.96 86.87,8.96 84.99,10.84 84.99,24.48 83.72,25.75 79.2,25.75 76.63,23.18 76.3,23.18
  Bottom 0.254: v67.39,34.28 69.78,34.28 69.8,34.26
  Bottom 0.406: v82.3,46.93 v82.3,53.77
  Bottom 1.27: JP1.2 JP1.1 14.51,27.61 17.96,31.06 17.96,54.12 20.93,57.09 69.57,57.09 69.8,57.32 | v82.3,53.77 70.01,53.77 69.8,53.56 | 69.8,53.56 69.8,34.26 69.8,32.46 71.25,31.01 82.65,31.01 85.4,28.26 85.4,10.71 87.15,8.96 | 86.87,8.96 87.15,8.96 | 87.15,8.96 89.57,8.96 USB2.1 | 69.8,53.56 69.8,57.32 | 69.8,57.32 69.8,64.79 67.21,67.38 ROUTER.15
  pour Top (no thermals): 68.84,25.65 78.23,25.67 78.18,19.63 68.71,19.6
AGND  (1 unrouted)
  Top 1.27: C9.2 32.4,5.04 J2.S1
  Bottom 0.813: J2.S2 65.99,9.19 65.99,9.2
  Bottom 1.016: C6.2 65.99,9.2 66.98,9.2 | 66.98,9.2 C8.2 | 66.93,9.14 66.98,9.2
  Bottom 1.27: C7.2 33.94,6.68 J2.S1
ANT
  Bottom 0.305: U1.9 136.24,60.44 IPEX1.SIG
CLK_N
  Top 0.203: U12.3 78.25,42.09 78.13,41.98 78.13,41.04 78.29,40.88 C63.2 78.67,40.85 X3.1
CLK_P
  Top 0.203: U12.2 77.61,42.1 77.73,41.98 77.73,41.04 77.54,40.86 C61.2 77.47,40.6 77.47,38.07 77.17,37.77 X3.3
CSN
  Top 0.254: JP1.15 10.06,45.39 8.89,46.55 8.89,51.12 9.5,51.73 10.82,51.73 11.02,51.93 U4.27
DIO0  (via drill 0.33)
  Top 0.254: U4.58 v56.55,37.93 v56.54,37.94
  Route15 0.254: v56.54,37.94 56.54,44.75 58.02,46.22 121.19,46.22 v125.45,50.49
  Bottom 0.254: v125.45,50.49 131.22,50.49 U1.14
DIO1  (via drill 0.33)
  Top 0.254: U4.1 58.61,34.93 v58.63,34.94
  Route15 0.254: v58.63,34.94 58.63,44.62 59.49,45.49 122.25,45.49 v125.2,48.43
  Bottom 0.254: v125.2,48.43 U1.15
DIO2  (via drill 0.33)
  Top 0.254: U4.3 v53.09,33.15 v53.09,33.14
  Route15 0.254: v53.09,33.14 59.21,33.14 60.23,34.16 60.23,41.12 60.71,41.6 83.34,41.6 86.52,44.77 123.98,44.77 v125.63,46.43
  Bottom 0.254: v125.63,46.43 131.26,46.43 U1.16
GND  (via drill 0.38)
  Top 0.305: MINI_PCIE.43 126.77,26.31 126.75,26.33
  other vias: 58.12,28.37 10.9,66.45 9.02,66.47 10.87,67.77 9.02,67.77 66.6,28.44 66.5,26.82 64.72,26.92 64.72,28.47 64.72,29.99 66.5,29.99 68.1,32.79 10.87,69.04 53.01,22.19 88.6,41.22 14.98,69.31 76.2,29.13 69.68,7.79 65.97,14.45 93.14,26.72 93.12,24.73 91.82,26.64 90.6,26.69 91.8,24.86 94.64,19.43 26.79,25.93 31.31,21.99 20.21,22.12 81.86,29.13 78.99,29.13 82.24,16.73 78.99,27.38 80.74,38.91 80.72,37.66 56.49,28.65 54,16.68 57.46,20.67 59.34,20.67 53.98,14.35 56.47,14.42 58.93,14.47 61.34,14.47 63.55,14.47 71.5,3.58 82.22,15.08 82.22,11.25 71.76,7.72 71.45,1.77 89.11,5.3 85.8,5.43 96.42,5.15 100.21,5.56 92.71,5.33 69.57,5.89 69.55,3.73 69.7,1.75 71.61,5.81 71.68,9.7 6.57,22.27 26.82,22.14 18.31,22.07 24.63,23.74 22.47,22.09 24.68,22.04 26.84,23.72 29.13,23.77 29.1,22.14 1.54,28.16 22.45,23.74 19.98,25.42 20.19,23.67 18.23,25.39 16.28,22.07 18.26,23.67 14.17,22.04 12.24,21.99 10.31,22.09 8.4,22.07 3.47,17.47 3.6,19.02 1.52,18.51 1.52,14.45 1.49,12.54 1.52,8.43 1.54,6.37 4.08,1.95 1.44,4.26 1.54,1.72 3.93,6.47 11.83,15.64 9.42,15.54 11.86,17.27 9.32,17.29 9.44,13.69 9.42,11.88 27.6,1.44 4.01,8.4 4.01,10.43 17.67,17.27 13.96,17.29 1.77,20.52 15.95,17.34 19.32,17.24 21.23,17.27 24.89,15.26 24.89,17.11 24.58,13.15 22.96,15.23 24.84,11.58 24.15,9.85 25.27,8.66 24.58,7.06 24.28,5.02 28.98,17.06 30.68,17.06 28.95,14.98 30.68,14.96 28.93,12.95 30.68,12.87 28.95,10.79 30.68,10.82 29,8.73 30.65,8.71 28.95,6.8 30.68,6.75 28.93,4.77 27.76,2.89 29.08,1.44 30.78,1.39 29.05,2.89 26.16,1.42 125.81,41.14 80.46,14.96 82.81,36.39 73.18,56.84 80.7,36.44 5.4,17.44 7.39,17.29 1.7,23.59 22.96,17.17 82.78,37.66 83.77,36.9 86.67,36.9 89.94,41.19 88.17,38.98 88.06,36.9 89.41,38.96 89.39,36.9 90.76,38.98 90.73,36.88 92.1,38.98 93.4,38.96 93.45,36.9 94.85,38.96 94.87,36.9 96.29,38.96 96.29,36.9 97.72,38.96 99.09,38.96 99.19,36.93 100.54,38.96 100.64,36.93 102.03,38.96 102.24,36.88 103.74,38.96 105.29,38.96 105.29,36.9 106.78,38.98 106.81,36.9 108.36,38.96 108.38,36.9 109.93,38.96 109.96,36.9 111.43,38.96 111.48,36.9 113.01,38.96 112.98,36.9 114.35,38.96 114.35,36.9 115.67,38.96 115.73,36.9 117,38.96 117.02,36.88 118.39,38.96 118.39,36.9 89.39,35.66 94.19,41.17 96.8,41.22 102.44,41.17 95.61,61.67 97.31,61.72 93.88,61.62 92.33,63.7 92.33,61.59 92.38,58.82 89.92,62.58 89.41,71.78 95.74,72.84 98.22,72.94 102.82,70.23 102.7,67.58 102.44,60.29 100.49,65.12 100.38,62.81 100.64,67.56 100.76,70.2 105.01,70.25 104.98,67.61 104.93,62.81 107.6,60.42 107.57,65.22 107.44,62.66 104.85,60.37 109.93,65.15 102.54,62.78 112.8,65.12 116.92,70.23 117.17,67.63 117.12,65.22 110.14,62.76 110.06,60.52 120.09,72.11 122.76,72.05 122.81,70 122.81,67.71 122.86,65.45 122.81,63.47 125.71,63.42 125.68,65.53 125.78,67.56 125.81,70 125.76,72.11 128.5,72 128.55,70.02 128.53,67.53 128.58,65.37 131.45,72.11 131.55,67.56 131.45,65.32 131.37,63.32 134.8,65.3 100.1,60.27 137.72,67.48 137.65,65.2 105.21,41.22 107.93,41.19 110.75,41.19 113.72,41.19 116.69,41.17 131.96,40.23 137.49,40.2 134.7,38.32 137.65,38.25 134.72,36.34 137.57,34.34 105.21,10.56 114.33,7.11 114.4,4.9 109.88,4.74 107.88,4.67 105.03,1.37 102.9,4.41 102.87,1.37 82.22,13.2 116.08,9.6 116.03,1.42 116.11,4.85 118.39,4.92 120.55,4.85 1.52,10.48 31.29,23.79 112.73,62.71 117.1,62.86 104.98,65.25 102.59,65.17 95.15,70 101.83,18.89 102.97,7.49 105.16,7.56 107.8,7.26 110.01,7.26 112.17,7.26 116.11,7.13 105.13,4.47 137.59,36.44 135.26,32.35 137.59,32.25 118.47,7.16 120.65,7.06 80.47,16.89 78.69,16.83 81.84,27.38 6.57,23.97 8.43,23.82 10.28,23.74 12.19,23.67 14.19,23.62 16.23,23.64 16.17,25.34 14.32,25.47 12.29,25.47 10.36,25.5 8.5,25.5 6.57,25.6 18.18,26.99 19.76,27.17 18.18,28.6 16.15,26.97 15.08,32.23 107.6,67.58 112.91,67.53 103.69,36.88 92.1,36.93 97.74,36.88 110.06,67.69 107.67,70.25 110.06,70.28 112.91,70.12 90.55,20.95 96.95,16 110.29,18.33 108.46,22.09 120.04,36.88 107.85,30.22 121.69,36.88 122.91,36.65 123.29,34.26 123.29,35.5 125.43,34.23 125.38,35.4 125.38,36.55 124.97,37.59 124.06,38.45 122.61,38.96 121.24,38.96 119.79,38.96 120.07,21.99 131.04,22.37 132.72,22.42 90.58,24.81 131.85,38.32 129.52,36.52 116.21,35.05 118.39,35.12 120.2,35.17 113.77,30.25 116.31,27.66 116.21,26.16 118.42,27.63 118.37,26.21 120.55,27.68 122.61,27.71 122.66,26.28 120.55,26.21 135.18,29 135.18,27.45 135.66,24.58 127.99,22.35 118.21,21.97 116.26,21.91 116.26,19.96 118.24,20.06 120.09,20.11 116.28,18.03 118.29,18.08 120.2,18.23 116.28,16.2 118.37,16.28 120.27,16.28 101.55,16.02 118.39,14.17 120.32,14.24 101.65,13.02 97.11,13.79 97.03,11.32 94.44,16 93.6,13.91 89.94,14.65 80.47,18.51 78.69,18.56 83.8,2.41 116.21,11.88 118.34,11.86 118.37,9.65 112.07,4.92 120.48,12.01 121.77,35.15 138.28,14.4 102.95,10.43 103.05,13.33 105.18,13.28 104.57,21.33 102.87,15.92 105.13,15.95 114.61,12.52 131.98,36.57 134.75,34.51 131.91,34.67 129.47,34.72 135.61,23.18 135.69,26.06 129.31,22.37 108.11,28.85 107.7,27.71 110.62,28.82 110.39,27.4 111.84,27.4 109.45,26.26 111.03,26.28 112.25,26.26 106.51,30.58 104.93,30.42 104.45,29.31 104.57,27.43 103.03,35.4 102.31,32.53 102.34,33.9 106.99,22.07 110.04,22.04 111.69,22.09 104.52,19.15 105.21,17.6 97.95,19.15 131.6,69.9 134.78,67.41 134.9,69.87 137.75,69.84 112.17,76.52 112.3,78.63 114.84,78.73 114.73,76.42 117.3,76.45 117.45,78.66 120.2,76.45 120.22,78.61 122.99,78.53 122.91,76.37 125.61,76.35 125.68,78.48 107.95,9.52 120.37,1.54 118.42,1.37 116.03,3.22 118.32,3.25 120.5,3.22 1.49,16.5 126.8,28.04 128.88,28.01 126.8,26.44 128.96,26.49 89.36,73.81 89.28,76.42 92.05,76.47 92,74.06 91.95,72.26 95.63,75.51 95.58,77.87 98.02,75.53 98.02,77.9 100.05,75.51 100.16,77.92 82.63,76.58 82.68,74.47 76.41,76.73 76.41,74.57 76.46,72.49 70.41,76.6 70.28,74.65 70.26,72.56 63.78,76.32 63.76,74.06 63.71,72.03 57.05,76.47 57,74.16 9.04,69.14 28.9,25.95 31.21,25.93 37.54,26.18 48.31,26.06 62.77,39.26 62.79,38.09 62.77,36.85 62.74,35.61 62.72,34.46 73.79,44.42 75.24,44.47 76.61,44.44 78.06,44.42 79.38,44.47 85.3,36.9 91.42,41.22 92.89,41.27 95.41,41.22 98.17,41.17 99.65,41.14 101.04,41.19 103.84,41.22 106.51,41.19 109.3,41.22 112.17,41.14 115.27,41.19 118.16,41.09 119.56,41.09 121.03,41.09 122.61,41.09 124.11,41.04 106.1,43.5 111.56,43.53 115.29,43.53 118.82,43.56 126.55,43.48 127.87,45.21 127.56,41.02 125.81,38.65 127.49,38.35 127.41,36.42 127.46,34.64 129.52,38.37 129.57,40.25 129.49,42.08 129.54,43.76 132.01,43.71 132.03,42.13 134.65,43.94 134.67,42.11 134.7,39.97 137.54,42.18 137.59,43.96 134.57,46.04 137.52,46.1 134.6,48.2 137.57,48.25 134.62,50.13 137.67,50.29 137.7,52.45 137.59,54.68 137.62,56.97 134.85,59.56 134.32,56.92 134.37,54.66 122.84,59.43 122.79,57.22 122.81,55.11 120.2,70.02 120.32,67.84 120.27,65.5 120.3,63.6 120.3,61.51 120.22,59.51 120.25,57.22 120.12,55.06 125.86,59.51 125.78,57.27 125.89,55.37 126.04,53.59 128.6,63.34 128.65,59.61 128.7,57.55 128.73,55.39 128.73,53.69 134.78,63.27 137.77,63.22 122.84,61.44 125.81,61.39 128.73,61.41 117.07,60.52 112.52,60.47 110.06,58.36 79,69.77 78.95,68.04 81.51,68.02 81.66,69.69 84,69.79 84,68.07 86.36,68.02 86.36,69.69 89.31,69.82 89.26,68.07 82.68,72.89 82.55,71.27 75.82,70.4 75.67,68.7 78.44,65.73 78.44,64.18 78.44,61.16 78.44,62.71 81.16,65.81 83.77,65.81 83.8,64.38 84.2,62.61 84.2,61.11 85.91,61.01 85.91,62.61 85.91,64.36 85.93,65.88 87.99,65.88 87.99,64.36 88.01,62.68 88.12,61.01 89.87,65.88 89.89,64.31 89.97,61.03 70.21,70.45 70.08,68.3 71.99,65.5 72.19,68.07 72.29,70.35 72.42,72.66 63.6,69.79 56.92,72.03 56.9,69.79 55.48,65.4 57.89,65.48 62.51,65.27 64.37,65.27 73.36,63.09 74.55,64.74 76.51,62.55 76.51,64.18 76.51,65.81 71.78,56.79 50.75,61.41 52.73,61.46 30.23,64.99 27.16,65.15 26.98,61.49 30.18,63.34 31.8,63.37 33.53,63.44 21.31,71.19 23.29,71.27 25.3,71.29 27.43,71.29 23.12,68.65 25,68.57 27.21,68.73 29.57,71.19 28.81,68.32 23.07,66.77 25.07,66.82 27.13,66.8 25.07,65.12 23.07,64.89 19.1,68.24 12.45,58.52 14.99,58.52 17.35,58.6 12.5,56.37 15.09,56.37 12.45,53.04 15.09,52.99 12.57,54.66 15.14,54.69 7.44,58.52 10.21,58.6 12.47,49.25 15.14,49.23 12.45,46.79 12.5,45.04 15.19,46.79 14.96,45.09 12.47,43.06 12.52,41.43 12.52,39.88 15.09,43.16 15.04,41.38 15.09,39.96 12.45,37.72 12.45,35.77 12.45,33.94 12.52,31.96 12.52,29.85 15.09,37.57 15.01,35.72 14.96,33.96 14.83,30.05 1.65,25.65 1.39,30.42 1.34,32.89 1.57,35.58 1.52,37.89 1.52,40.28 1.39,42.54 1.42,53.44 1.42,55.98 1.42,58.77 1.44,61.46 1.42,64.16 1.7,66.21 19.7,28.93 19.76,30.42 21,30.42 21,28.93 21.13,27.4 21.94,26.66 22.93,25.88 24.25,25.85 25.57,25.85 23.16,30.63 24.94,30.5 23.16,29.33 23.67,28.26 24.81,28.01 26.36,28.01 25.37,28.98 27.17,32.15 27.17,30.91 27.55,29.87 28.37,29.15 29.74,29.1 31.13,29.13 32.79,29.18 31.77,30.2 31.03,31.36 29.15,31.97 29.15,30.47 33.12,32 33.93,30.96 35.1,30.25 36.7,30.25 35.58,31.31 37.99,31.92 39.21,31.39 22.22,55.29 24.2,55.29 26.36,55.29 28.57,55.29 30.68,55.29 32.86,55.29 22.14,50.54 48.13,42.23 46.22,42.23 38.65,45.03 43.58,44.24 44.32,42.31 42.23,42.26 40.28,42.34 36.95,42.31 35.22,42.29 33.29,42.29 31.26,42.29 29.33,42.21 27.55,42.29 25.88,42.23 24.23,42.23 22.6,42.23 38.63,42.29 22.58,40.36 22.55,38.68 22.55,37.13 24.3,40.43 24.28,38.7 24.28,37.1 25.88,40.48 27.55,40.53 29.56,40.58 25.93,38.81 27.6,38.83 29.48,38.93 26,37.23 27.68,37.31 29.48,37.33 31.44,40.51 31.39,39.01 31.41,37.31 33.32,40.66 33.32,38.96 33.32,37.33 35.28,40.63 35.28,39.09 35.28,37.21 37.08,40.61 37.08,39.09 37.1,37.33 38.75,40.66 38.78,39.09 38.86,37.46 40.36,40.69 40.41,39.14 40.41,37.56 42.21,40.89 42.23,39.16 42.26,37.51 44.19,40.79 44.24,39.31 44.27,37.56 46.25,40.76 46.2,39.24 46.15,37.61 48.08,40.84 48,39.26 47.95,37.59 51.12,42.34 50.31,40.94 50.36,39.26 52.34,39.29 54.25,39.16 50.74,37.43 52.29,37.56 54.1,37.69 80.6,33.47 81.13,32.46 87.86,12.59 89.26,12.59 90.55,12.62 91.85,12.62 91.21,14.68 92.54,14.68 94.14,12.62 82.83,35.2 80.72,35.2 117.1,52.57 118.87,52.57 117.1,50.44 118.85,50.49 120.81,50.49 122.53,50.49 117.17,48.46 118.9,48.53 120.63,48.53 122.41,48.58 112.65,58.34 115.12,70.25 115.27,67.63 115.22,65.04 115.24,62.89 30.65,4.8 64.82,39.26 64.77,38.07 64.82,36.8 64.8,35.58 64.77,34.44 68.07,39.26 68.07,37.82 68.1,36.47 71.38,39.31 73.1,39.31 71.43,37.79 71.43,36.32 73.21,36.37 73.05,37.84 77.73,36.14 79.25,36.22 75.26,43 110.04,78.73 110.11,76.45 110.09,74.21 112.07,74.29 114.63,74.26 117.25,74.26 120.12,74.29 122.94,74.34 125.68,74.34 102.14,73.17 102.09,75.48 102.16,77.87 85.04,72.97 84.94,71.32 53.01,73.96 52.99,71.88 52.89,69.74 59.13,72.08 59.11,69.84 71.45,16.61 67.69,16.48 63.73,16.4 61.45,16.5 58.78,16.28 56.14,16.48 112.19,12.57 110.29,12.64 108.16,12.52 133.02,59.56 133.02,61.31 134.85,61.31 34.82,32.79 40.91,32.86 30.93,32.84 23.18,32.3 24.94,32.28 21.03,32.3 34.61,55.32 36.01,55.29 38.55,55.37 22.22,52.27 22.14,48.74 22.14,46.86 22.14,45.23 25.52,50.69 27.73,50.72 29.64,50.72 31.67,50.82 33.95,50.82 35.78,50.92 25.6,48.46 27.81,48.61 29.56,48.66 31.97,48.79 33.83,48.79 35.71,48.79 25.6,46.43 27.86,46.6 29.84,46.73 31.8,46.78 33.7,46.91 35.58,46.81 25.55,44.14 27.91,44.27 30.02,44.27 31.9,44.39 33.73,44.6 35.3,44.52 40.33,45.08 42.03,45.11 61.77,47.8 64.03,47.72 65.86,47.72 67.91,47.8 71.62,47.92 73.15,48 71.9,42.9 67.96,42.77 62.78,40.63 64.82,40.63 68.07,40.61 71.34,40.63 72.97,40.71 88.87,43.68 90.29,43.68 91.82,43.68 93.34,43.68 96.34,43.68 97.96,43.63 99.51,43.58 101.11,43.56 102.61,43.56 104.06,43.5 109.49,43.53 113.46,43.53 117.04,43.56 120.42,43.48 122.17,43.45 124.2,43.45 86.94,47.26 88.64,47.31 90.19,47.29 91.87,47.29 93.47,47.29 95.17,47.31 96.95,47.31 98.65,47.34 100.43,47.34 102.23,47.37 103.98,47.34 105.58,47.37 107.28,47.37 108.91,47.37 110.74,47.42 112.49,47.37 88.64,49.37 90.27,49.37 91.92,49.4 93.85,49.42 95.55,49.42 97.1,49.42 98.78,49.45 100.43,49.4 102.2,49.4 103.98,49.4 105.73,49.4 107.44,49.37 108.86,49.35 110.84,49.42 99.16,53.64 101.24,53.59 103.37,53.56 105.51,53.49 107.56,53.54 109.75,53.56 111.75,53.56 117.16,57.98 117.34,56.18 117.34,54.12 107.61,58.52 105,58.52 102.51,58.64 100.12,58.52 100.07,56.97 102.66,56.94 104.92,56.81 107.74,56.76 110.1,56.81 84.58,57.25 86.58,57.22 88.44,57.32 88.79,51.3 90.62,51.3 92.2,51.3 93.87,51.28 95.93,51.3 97.61,51.3 99.49,51.25 101.37,51.3 103.17,51.28 104.97,51.28 107.03,51.28 109.11,51.3 110.99,51.3 1.44,51.05 1.44,48.94 1.42,46.58 1.44,44.39 84.71,31.29 85.75,30.14 83.14,33.45 84.69,33.45 86.49,32.96 87.94,30.78 87.94,29.33 87.94,27.88 87.94,26.26 87.94,24.35 87.96,22.73 87.89,21.2 88.78,14.9 88.01,15.69 86.77,13.94 71.63,59.71 74.09,59.79 76.86,59.76 79.48,59.79 84.2,59.79 82.04,59.66 85.91,59.63 88.12,59.63 89.89,59.56 107.75,43.56 94.74,43.61 61.98,58.72 58.75,61.06 56.46,47.92
  pour Route15 (rank 2, no thermals): 141.07,-0.69 141.07,81.3 50.57,81.12 50.57,72 7.29,72 7.29,81.05 -1.8,81.07 -1.85,-1 4.68,-1 4.68,11.4 19.43,11.4 19.43,-1.05 31.42,-1.05 31.42,18.05 53.01,18.05 53.09,13.63 67.72,13.63 67.64,-1.12 85.25,-1.12 85.25,4.52 101.07,4.52 101.07,-0.69
  pour Bottom (rank 2, no thermals): 140.87,-0.84 140.87,81.2 50.57,81.12 50.57,72 7.29,72 7.29,81.07 -1.83,81.05 -1.83,-1 4.68,-1 4.68,11.4 19.43,11.4 19.43,-1.05 31.42,-1.1 31.42,18.05 53.01,18.05 53.01,13.61 67.74,13.61 67.74,-1.1 85.25,-1.1 85.25,4.57 101.02,4.57 101.02,-0.69
  pour Top (no thermals): 101.76,28.26 101.76,23.36 95.08,23.36 95.08,24.23 89.08,24.2 89.06,27.3 95.15,27.22 95.18,28.26
  pour Top (rank 2, no thermals): 141.07,-0.69 141.07,81.3 50.57,81.12 50.57,72 7.29,72 7.29,81.05 -1.8,81.02 -1.85,-1 4.68,-1 4.68,11.4 19.43,11.4 19.43,-1.05 31.42,-1.05 31.42,18.05 53.01,18.05 53.09,13.63 67.72,13.63 67.64,-1.12 85.25,-1.12 85.25,4.52 101.07,4.52 101.07,-0.69
  pour Route2 (rank 2, no thermals): 140.87,-0.84 140.87,81.2 50.57,81.12 50.57,72 7.29,72 7.29,81.07 -1.83,81.07 -1.83,-1 4.68,-1 4.68,11.4 19.43,11.4 19.43,-1.05 31.42,-1.1 31.42,18.05 53.01,18.05 53.01,13.61 67.74,13.61 67.74,-1.1 85.25,-1.1 85.25,4.57 101.02,4.57 101.02,-0.69
GPIO1  (via drill 0.33)
  Top 0.254: v66.75,43.35 66.75,36.49 67.85,35.4 74.22,35.4 74.86,34.77 R15.1 | U4.38 37.09,44.9 38.64,43.35 v50.45,43.35
  Bottom 0.254: v50.45,43.35 v66.75,43.35
GPIO11  (via drill 0.33)
  Top 0.254: U4.57 56.05,39.93 55.4,39.29 v55.4,37.28 | v54.33,25.95 R13.2 C15.2
  Bottom 0.254: v55.4,37.28 55.4,25.95 | 55.4,25.95 55.4,21.41 57.79,19.02 75.87,19.02 76.79,18.1 76.79,4.9 77.8,3.88 S1.2 | v54.33,25.95 55.4,25.95
GPIO15  (via drill 0.33)
  Top 0.254: R40.1 v85.75,34.34 | v77.63,34.34 77.09,34.34 73.97,37.46 73.97,42.46 72.06,44.37 v65.64,44.37 | U4.41 43.09,46.06 44.78,44.37 v51.64,44.37
  Bottom 0.254: v51.64,44.37 v65.64,44.37 | v85.75,34.34 v77.63,34.34
GPIO16  (via drill 0.33)
  Top 0.254: U4.42 45.09,56.5 45.8,55.8 55.81,55.8 56.47,56.46 56.47,60.88 57.56,61.97 74.2,61.97 75.62,63.39 v75.62,67.05 | R38.1 v95.2,67.05
  Bottom 0.254: v95.2,67.05 v75.62,67.05
GPIO27
  Top 0.254: R20.1 78.49,71.32 77.55,70.38 77.55,61.79 76.61,60.85 61.39,60.85 60.3,59.76 60.3,33.88 58.55,32.13 51.56,32.13 51.09,32.6 U4.4
GPIO28
  Top 0.254: R25.1 73.52,65.29 71.07,62.83 50.09,62.83 49.09,61.84 U4.44
LED0
  Top 0.254: R19.1 54.49,66.59 52.63,64.74 36.3,64.74 35.09,63.53 U4.37
LED2  (via drill 0.33)
  Top 0.254: v67.21,63.85 R21.1 | v39.12,61.03 39.12,58.51 39.09,58.53 U4.39
  Bottom 0.305: v39.12,61.03 39.12,63.24 39.68,63.8 67.16,63.8 v67.21,63.85
LED6
  Top 0.254: R23.1 60.82,65.01 59.46,63.65 47.98,63.65 47.09,62.76 U4.43
MISO
  Top 0.254: JP1.17 U4.25 | 20.04,47.93 U4.25 | U4.25
MOSI
  Top 0.254: JP1.16 7.63,44.89 8.44,44.09 15.5,44.09 17.33,45.92 19.64,45.92 | 19.64,45.92 20.03,45.92 | U4.24 19.62,45.93 19.64,45.92
MOSI_AT
  Top 0.254: SV2.4 97.44,71.27 97.84,70.87 U8.5
N$1
  Top 0.254: SYS.A R25.2
N$2
  Top 2.184: L5.2 J1.GND@1 13.99,4.07 J1.GND@2
N$3
  Top 2.184: F1.2 19.89,14.32 21.97,12.24 21.97,5.46 L4.2
N$4
  Top 0.254: U8.3 96.45,58.36 JP2.3
N$7
  Bottom 0.61: R6.1 38.64,10.97 37.57,12.03 T1.13
N$12
  Top 2.184: J1.PWR 12.83,13.3 13.85,14.32 F1.1
N$13
  Top 0.254: SENSOR.K R20.2
N$16
  Top 0.254: R57.1 70.67,30.78 70.84,30.96 Q1.1
  Top 0.305: U3.3 R57.1
N$17
  Top 0.61: U3.7 R10.1
N$18
  Top 0.305: U12.26 78.25,49.66 R86.1
N$19
  Top 0.254: Q1.3 R14.2 R15.2
N$20
  Top 0.61: U3.6 C58.2
N$22
  Top 0.305: R55.1 R56.2 63.25,31.29 U3.5
N$23
  Top 0.254: WIFI.A R19.2
N$24
  Top 0.305: U2.1 12.98,65.86 C1.2
  Top 0.61: C1.2 14.73,65.86 14.73,65.66
  Top 0.813: U2.1 12.78,65.41 16.89,65.41 16.89,65.74 L6.P$1
N$25
  Top 0.305: R46.2 14.86,68.2 U2.3
N$26
  Top 0.61: R7.1 4.65,66.93 U2.7
N$27
  Top 0.61: C1.1 14.91,66.93 U2.2
N$29
  Top 0.61: C57.1 R9.2
N$30
  Top 0.254: LAN.K 68.09,71.34 R21.2
N$31
  Top 0.61: C57.2 U2.6
N$32
  Top 0.61: R16.1 C58.1
N$34
  Top 0.406: U3.1 70.59,26.94 C17.2 75.06,27.38 L2.P$1
  pour Top (no thermals): 67.64,27.07 70.18,27.07 70.18,27.33 71.96,27.33 71.96,28.21 77.8,28.21 77.8,26.06 67.64,26.06
N$35
  Top 0.254: PWR.K R24.2
N$39  (via drill 0.25)
  Top 0.203: C35.1 R34.2 v39.58,26.03 | v41.58,26.03 R33.2
  Bottom 0.203: v39.58,26.03 v41.58,26.03
N$40  (via drill 0.25)
  Top 0.203: R36.2 v33.56,25.9 | v35.59,25.9 R35.2
  Top 0.254: C36.1 R36.2
  Bottom 0.203: v33.56,25.9 v35.59,25.9
N$41
  Bottom 0.61: R1.2 52.87,8.14 53.49,7.52 J2.2-8 54.28,7.5 54.28,6.29 54.84,5.74 J2.2-7
N$42
  Bottom 0.61: R2.2 57.29,9.2 58.4,8.1 58.4,7.54 J2.2-4 57.36,6.5 J2.2-5
N$43  (via drill 0.25)
  Top 0.203: C33.1 R29.2 v51.56,26.08 | R30.2 v49.56,26.08
  Bottom 0.203: v49.56,26.08 v51.56,26.08
N$44  (via drill 0.25)
  Top 0.203: R32.2 v43.59,26.08 | v45.57,26.08 R31.2 C34.1
  Bottom 0.203: v43.59,26.08 v45.57,26.08
N$45
  Bottom 0.61: R3.1 48.42,10.2 47.57,11.05 T1.18
N$46
  Bottom 0.61: R3.2 R1.1 R2.1 55.46,11.13 55.96,11.63 60.91,11.63 61.69,10.85 C6.1
N$49
  Top 0.254: R41.2 5.3,71.21 5.03,70.94 R8.1
  Top 0.305: U2.5 6.96,69.47 6.96,70.23 R8.1
N$51
  Bottom 0.61: R5.2 38.84,7.81 J2.1-8 38.53,7.5 38.53,6.29 39.09,5.74 J2.1-7
N$52
  Bottom 0.61: J2.1-5 41.61,6.5 J2.1-4 41.97,8.17 R4.2
N$54
  Bottom 0.61: R6.2 39.75,9.98 | 39.75,9.98 R5.1 | R4.1 39.8,9.93 39.75,9.98 | 39.75,9.98 37.05,9.98 C7.1
N$55
  Top 0.61: C17.1 68.48,28.29 U3.2
N$56
  Top 0.305: U9.5 89.46,22.83 89.13,22.5 R26.2 R11.1
N$63
  Top 0.254: U9.3 Q2.1 R27.1
N$64
  Top 0.254: U9.7 92.48,21.61 93.09,21 R12.1
N$65
  Top 0.254: R40.2 R39.2 89.17,33.09 Q2.3
N$66
  Top 0.254: U9.6 91.21,21.48 91.75,20.95 C30.2
N$67
  Top 0.254: R42.1 C30.1
N$68
  Top 0.406: U9.1 93.75,30.58 | C27.2 93.73,30.6 93.75,30.58 | 93.75,30.58 93.75,34.4 L1.P$1
  pour Top (no thermals): 94.62,36.04 94.49,27.88 93.32,27.88 93.35,32.56 92.71,32.56 92.69,36.04
N$69
  Top 0.254: C27.1 U9.2
N$109
  Top 0.254: U12.14 R81.2 | R81.2
N$111  (via drill 0.25)
  Top 0.254: U12.17 v84.01,46.99 v84,46.98 | v84,51.3 83.12,51.3 83.12,51.31 R82.1
  Bottom 0.254: v84,46.98 v84,51.3
N$112
  Top 0.254: U12.19 82.73,49.22 83.09,49.58 83.09,50.21 83.08,50.22 R83.1
N$113
  Top 0.254: R85.1 86.7,50.62 86.46,50.39 85.91,50.39 85.8,50.28 R84.2 83.94,49.69 83.37,49.12 U12.18
P0_R_N
  Top 0.203: T1.17 45.57,13.66 44.78,12.87 44.78,10.65 46.06,9.37 54.85,9.37 56.34,7.88 J2.2-6
P0_R_P
  Top 0.203: T1.16 43.57,13.67 44.38,12.87 44.38,10.48 45.89,8.96 54.68,8.96 55.32,8.32 55.32,7.11 56.06,6.37 56.62,6.37 57.03,6.78 57.74,6.78 58.78,5.74 J2.2-3
P0_RX_N
  Top 0.203: R31.1 44.79,24.04 44.78,24.05 | 44.78,24.05 44.78,23.04 T1.4 | U4.13 33.09,34.33 32.31,33.55 32.31,31.42 34.33,29.41 43.75,29.41 44.78,28.37 44.78,24.05
P0_RX_P
  Top 0.203: R32.1 44.31,24.04 44.38,23.97 | 44.38,23.97 44.38,23.05 T1.5 | U4.14 31.09,34.36 31.91,33.55 31.91,31.25 34.16,29 43.58,29 44.38,28.21 44.38,23.97
P0_T_N
  Top 0.203: T1.20 51.57,13.57 50.8,12.8 50.8,11.13 51.37,10.56 58.94,10.56 60.42,9.08 J2.2-2
P0_T_P
  Top 0.203: T1.19 49.57,13.62 50.4,12.8 50.4,10.96 51.2,10.15 58.77,10.15 59.44,9.49 59.44,7.11 60.81,5.74 J2.2-1
P0_TX_N
  Top 0.203: R29.1 50.87,24.04 50.8,23.97 | 50.8,23.97 50.8,23.02 T1.1 | U4.11 37.09,34.29 36.3,33.5 36.3,32.41 38.19,30.53 49.34,30.53 50.8,29.06 50.8,23.97
P0_TX_P
  Top 0.203: R30.1 50.35,24.04 50.4,24 | 50.4,24 50.4,23.07 T1.2 | U4.12 35.09,34.3 35.89,33.5 35.89,32.24 38.02,30.12 49.17,30.12 50.4,28.89 50.4,24
P4_R_N
  Top 0.203: T1.12 35.57,13.7 34.78,12.9 34.78,10.06 35.7,9.14 39.36,9.14 40.59,7.91 J2.1-6
P4_R_P
  Top 0.203: T1.11 33.57,13.69 34.37,12.9 34.37,9.89 35.53,8.73 39.19,8.73 39.58,8.34 39.58,7.11 40.31,6.37 40.87,6.37 41.3,6.8 41.91,6.8 42.98,5.74 J2.1-3
P4_RX_N
  Top 0.203: R35.1 34.79,24.04 | 34.79,24.04 34.78,24.02 34.78,23.05 T1.9 | U4.18 23.09,34.26 22.28,33.45 22.28,28.4 23.48,27.2 34.1,27.2 34.78,26.52 34.78,24.06 34.79,24.04
P4_RX_P
  Top 0.203: R36.1 34.32,24.04 34.37,24 | 34.37,24 34.37,23.05 T1.10 | U4.19 21.09,34.23 21.87,33.45 21.87,28.23 23.31,26.79 33.93,26.79 34.37,26.35 34.37,24
P4_T_N
  Top 0.203: T1.15 41.57,13.37 40.9,12.69 40.9,10.01 41.59,9.32 43.32,9.32 44.67,7.97 J2.1-2
P4_T_P
  Top 0.203: T1.14 39.57,13.61 40.49,12.69 40.49,9.84 41.42,8.91 43.15,8.91 43.67,8.39 43.67,7.11 45.04,5.74 J2.1-1
P4_TX_N
  Top 0.203: R33.1 40.81,24.04 40.77,24 | 40.77,24 40.77,23.06 T1.6 | U4.16 27.09,34.3 26.29,33.5 26.29,29.95 27.95,28.29 39.53,28.29 40.77,27.05 40.77,24
P4_TX_P
  Top 0.203: R34.1 40.34,24.04 40.36,24.02 | 40.36,24.02 40.36,23.04 T1.7 | U4.17 25.09,34.29 25.89,33.5 25.89,29.78 27.78,27.88 39.36,27.88 40.36,26.89 40.36,24.02
RESET
  Top 0.254: JP1.19 17.62,50.47 18.16,49.93 20.04,49.93 U4.26
RESET_ROUTE  (via drill 0.33)
  Top 0.254: JP2.2 93.91,52.63 93.42,52.14 90.58,52.14 89.49,53.23 89.49,57.86 88.62,58.72 68.46,58.72 v67.19,59.99 | U4.46 53.09,60.48 53.55,60.93 v54.21,60.93
  Bottom 0.254: v67.19,59.99 55.15,59.99 v54.21,60.93
REST_AT
  Top 0.254: R22.1 C29.2 93.85,56.83 U8.1 93.85,59.55 94.34,60.04 98.12,60.04 99.09,61.01 SV2.5
RF_CSN  (via drill 0.33)
  Top 0.254: U4.28 22.44,53.93 v22.46,53.92
  Route15 0.254: v22.46,53.92 79.99,53.92 81.11,55.04 112.37,55.04 v112.98,54.43
  Bottom 0.254: v112.98,54.43 115.26,54.43 U1.5
RF_MISO  (via drill 0.33)
  Top 0.254: v49.1,37.54 U4.5
  Route15 0.254: v113.49,48.43 77.98,48.43 76.89,49.52 51.95,49.52 49.1,46.68 v49.1,37.54
  Bottom 0.254: U1.2 v113.49,48.44 v113.49,48.43
RF_MOSI  (via drill 0.33)
  Top 0.254: v41.07,50.82 41.07,58.91 U4.40
  Route15 0.254: v113.11,50.44 82.38,50.44 81.99,50.82 v41.07,50.82
  Bottom 0.254: U1.3 v113.11,50.44
RF_RESET  (via drill 0.33)
  Top 0.254: U4.56 56.16,41.93 55.37,42.72 55.37,54.15 v56.21,54.99
  Route15 0.254: v112.4,56.43 111.38,56.43 110.72,55.77 57,55.77 v56.21,54.99
  Bottom 0.254: U1.6 v112.4,56.44 v112.4,56.43
RF_SCK  (via drill 0.33)
  Top 0.254: U4.23 23.04,43.93 23.85,44.75 23.85,52.17 v23.88,52.19
  Route15 0.254: v23.88,52.19 112.55,52.19 v112.8,52.45
  Bottom 0.254: v112.8,52.45 U1.4
SCK  (1 unrouted)
  Top 0.254: JP1.18 6.41,47.93 5.77,47.29 5.77,39.67 6.4,39.03 16.79,39.03 17.71,39.95 20.03,39.95
SCK_AT
  Top 0.254: U8.7 R38.2 96.32,65.15 96.55,65.37 SV2.3
SIM_CLK
  Top 0.254: 114.2,19.58 114.2,19.4 114.4,19.2 SIM1.CLK | 114.2,19.58 114.2,27.4 111.17,30.43 MINI_PCIE.12 | U10.4 114.17,19.61 114.2,19.58
SIM_DATA
  Top 0.254: SIM1.IO 113.15,17.64 112.25,18.54 112.25,20.72 112.44,20.91 U10.6 113.12,27.59 110.37,30.34 MINI_PCIE.10
SIM_RST
  Top 0.254: SIM1.RST 111.88,15.45 | MINI_PCIE.14 111.97,30.77 115.32,27.43 115.32,13.94 114.94,13.56 112.32,13.56 111.86,14.02 SIM1.RST | U10.3 111.22,18.62 111.88,17.97 SIM1.RST
SIM_VCC
  Top 0.406: MINI_PCIE.8 109.57,27.93 108.33,26.69 106.63,26.69 105.64,25.7 105.64,20.9 | U10.1 109.26,20.91 C49.1 105.67,20.92 105.64,20.9 | SIM1.VCC 109.34,18.07 108.77,18.64 106.35,18.64 105.64,19.35 105.64,20.9
UART_RX  (via drill 0.33)
  Top 0.254: U4.35 v31.09,60.95
  Bottom 0.254: ROUTER.9 41.43,65.2 40.87,64.64 36.25,64.64 35.84,64.23 35.84,61.54 35.26,60.95 v31.09,60.95
UART_TX  (via drill 0.33)
  Top 0.254: U4.34 29.09,61.85 v29.11,61.87
  Bottom 0.254: v29.11,61.87 34.47,61.87 35.05,62.45 35.05,64.89 35.79,65.63 39.47,65.63 40.19,66.34 40.19,68.93 41.18,69.92 ROUTER.10
USB1_N
  Top 0.203: U12.10 82.73,42.26 82.83,42.16 82.83,38.8 83.89,37.74 123.03,37.74 124.16,36.61 124.16,33.85 123.97,33.67 MINI_PCIE.36
USB1_P
  Top 0.203: U12.11 83.37,42.29 83.24,42.16 83.24,38.97 84.06,38.15 123.2,38.15 124.56,36.78 124.56,33.85 124.77,33.64 MINI_PCIE.38
USB2_N
  Top 0.191: 81.56,33.67 81.56,33.22 82.58,32.2 85.45,32.2 86.67,30.98 86.67,15.23 88.44,13.46 92.33,13.46 92.9,12.89 92.9,11.32 | USB2.2 92.09,9.95 92.9,10.76 92.9,11.32 | D7.P$2 92.9,11.32
  Top 0.203: U12.8 81.45,42.15 81.56,42.03 81.56,33.67
USB2_P
  Top 0.191: 81.97,33.67 81.97,33.37 82.74,32.6 85.61,32.6 87.07,31.14 87.07,15.39 88.6,13.86 92.49,13.86 93.29,13.06 93.29,11.3 | USB2.3 94.09,9.97 93.29,10.76 93.29,11.3 | D9.P$2 93.32,11.32 93.29,11.3
  Top 0.203: U12.9 82.09,42.15 81.97,42.03 81.97,33.67
USB3.3  (via drill 0.25, 0.33)
  Top 0.254: C4.1 81.44,51.35 | v84.63,44.21 84.65,44.19 U12.13 84.65,41.73 C5.1 | R86.2 79.47,49.93 v80.67,49.93 81.37,49.93 81.45,49.85 | 81.44,51.35 81.45,51.33 81.45,49.85 | U12.21 81.45,49.85 | R83.2 R82.2 82.12,51.35 81.44,51.35
  Bottom 0.254: v84.63,44.21 82.31,44.21 81.44,45.08 81.44,49.17 v80.67,49.93
USB_GND  (1 unrouted)
USB_N
  Top 0.203: U4.9 41.09,34.32 41.86,33.55 41.86,31.74 42.51,31.08 60.49,31.08 61.88,32.47 61.88,43.12 64.07,45.31 84.29,45.31 85.19,46.21 85.19,47.34 85.29,47.43 U12.15
USB_P
  Top 0.203: U4.8 43.09,34.37 42.27,33.55 42.27,31.91 42.68,31.49 60.32,31.49 61.47,32.64 61.47,43.28 63.9,45.71 84.12,45.71 84.8,46.39 84.79,46.4 84.79,47.34 84.65,47.48 U12.16
VCC18  (via drill 0.25, 0.33)
  Top 0.254: C11.1 75.22,48.13 v76.15,48.13 v76.16,48.12 U12.28 | U12.12 84.01,39.75 v84,39.75 v84.01,39.74 C12.1
  Bottom 0.254: v76.15,48.13 80.04,48.13 80.83,47.34 80.83,40.13 81.21,39.74 v84.01,39.74
VCC_3G  (via drill 0.33)
  Top 0.254: v103.51,28.19 103.51,28.8 102.37,29.94
  Top 0.305: R11.2 v87.89,17.16
  Top 0.61: MINI_PCIE.2 C83.1 | C83.1 | MINI_PCIE.24 119.17,29.31 119.33,29.15 | C83.1 C81.1 C80.1 | MINI_PCIE.41 MINI_PCIE.39 125.43,24.12 | MINI_PCIE.52 130.37,30.64 128.91,29.18 123.98,29.18 123.95,29.15
  Top 0.813: C41.1 102.37,29.94 103.48,31.06 103.48,33.32 104.9,34.74 C83.1 | C83.1 113.55,34.73 115.04,33.24 115.04,30.25 116.13,29.15 119.33,29.15 123.95,29.15 124.13,29.15 125.43,27.86 125.43,24.12 125.43,18.55 C31.+ C23.+ 125.26,8.83 | 125.26,8.83 125.26,3.98 C24.+ | C25.+ 125.48,8.62 125.26,8.83
  Bottom 0.254: v87.89,17.16 102.29,17.16 103.51,18.38 v103.51,28.19
  pour Top (no thermals): 101.48,36.09 101.53,28.9 95.18,28.9 95.25,35.99
  pour Top (no thermals): 124.84,25.39 124.87,23.11 126.27,23.11 126.29,25.39
VIN  (via drill 0.33)
  Top 0.254: R57.2 v72.82,29.48 | v59.52,23.49 59.52,22.22 59.72,22.02 60.91,22.02 | R27.2 v89.72,34.41 | v96.45,18.41 96.45,21.25
  Top 0.406: R46.1 v17.11,68.23 v17.12,68.22 | v3.15,64.26 4.98,64.26 5.08,64.15 | 61.6,22.02 61.6,24.18 C22.1 61.67,24.3 61.67,26.11 62.51,26.94 U3.8
  Top 0.61: U9.8 93.75,21.84 94.24,21.36 C14.1 | C14.1 | C14.1 96.45,21.25
  Top 1.27: 61.6,22.02 C56.1 61.67,21.84 61.67,20.01 60.75,19.08 | 100,21.33 C42.1 | L4.1 25.02,2.43 26.85,4.26 26.85,18.82 26.77,18.89 | 26.77,18.89 6.1,18.89 3.36,21.64 3.36,61.46 3.97,62.07 4.61,62.07 C53.1 | 5.04,60.27 C19.1 C53.1 | 26.77,18.89 60.56,18.89 60.75,19.08 | C42.1 99.82,21.2 99.82,8.86 97.74,6.78 84.58,6.78 73.31,18.05 61.78,18.05 60.75,19.08 | C14.1 C42.1 | U2.8 6.59,65.66 5.08,64.15 5.1,64.13 C53.1
  Bottom 0.254: v72.82,29.48 72.82,24.38 71.94,23.49 v59.52,23.49 | v96.45,18.41 90.38,18.41 89.72,19.07 v89.72,34.41
  Bottom 0.406: v17.12,68.22 17.12,64.97 16.41,64.26 v3.15,64.26
  pour Top (no thermals): 58.75,27.2 63.58,27.2 63.58,26.18 62.59,26.18 62.66,19.5 60.2,19.5 60.12,24.53 58.75,24.53
  pour Top (no thermals): 94.14,23.62 94.14,22.73 101.58,22.73 101.58,20.37 94.31,20.37 94.34,21.36 93.37,21.36 93.35,23.62
YELLOW
  Top 0.254: WAN.K R23.2

## Text on the board
tPlace: Model:LG08-v1.0.2 | URAT-TX | URAT-RX | GPIO23 | GPIO20 | GPIO24 | GPIO18 | GPIO19
214bmp: D:/SmartProjects/Snc/a4_bn_logo2.bmp